# Altium PCB NES Emulator PCB.PcbDoc (part 1 of 3)
Units mm, origin at the board's own origin, x right, y up, seen from the top; angles counter-clockwise.
Board outline 76 x 100 mm, 4 copper layers (Top Layer, GND Plane, Power Layer, Bottom Layer), stack 0.603 mm thick; 101 components, 158 nets, 536 pads, 230 vias.
Unrouted connection lines stored in the file: 6.
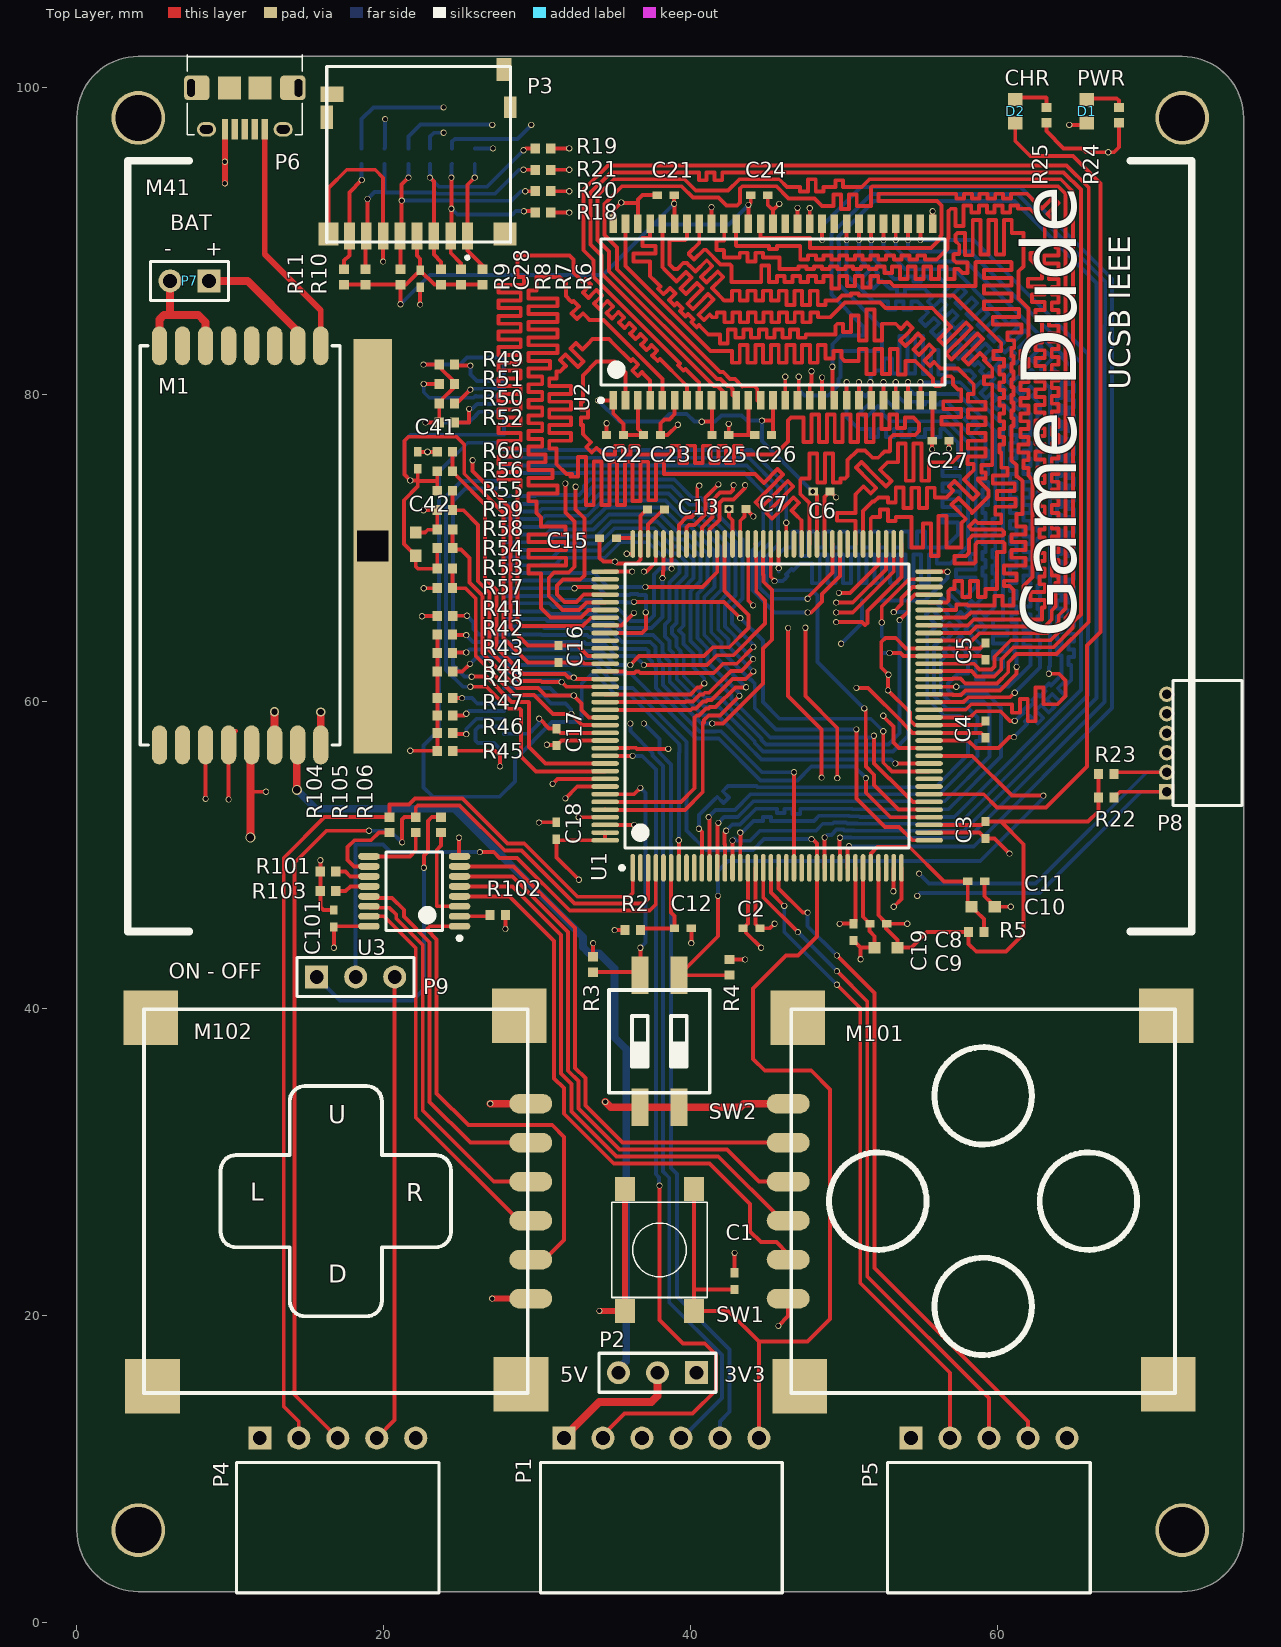
[diagram p0: Top Layer view]
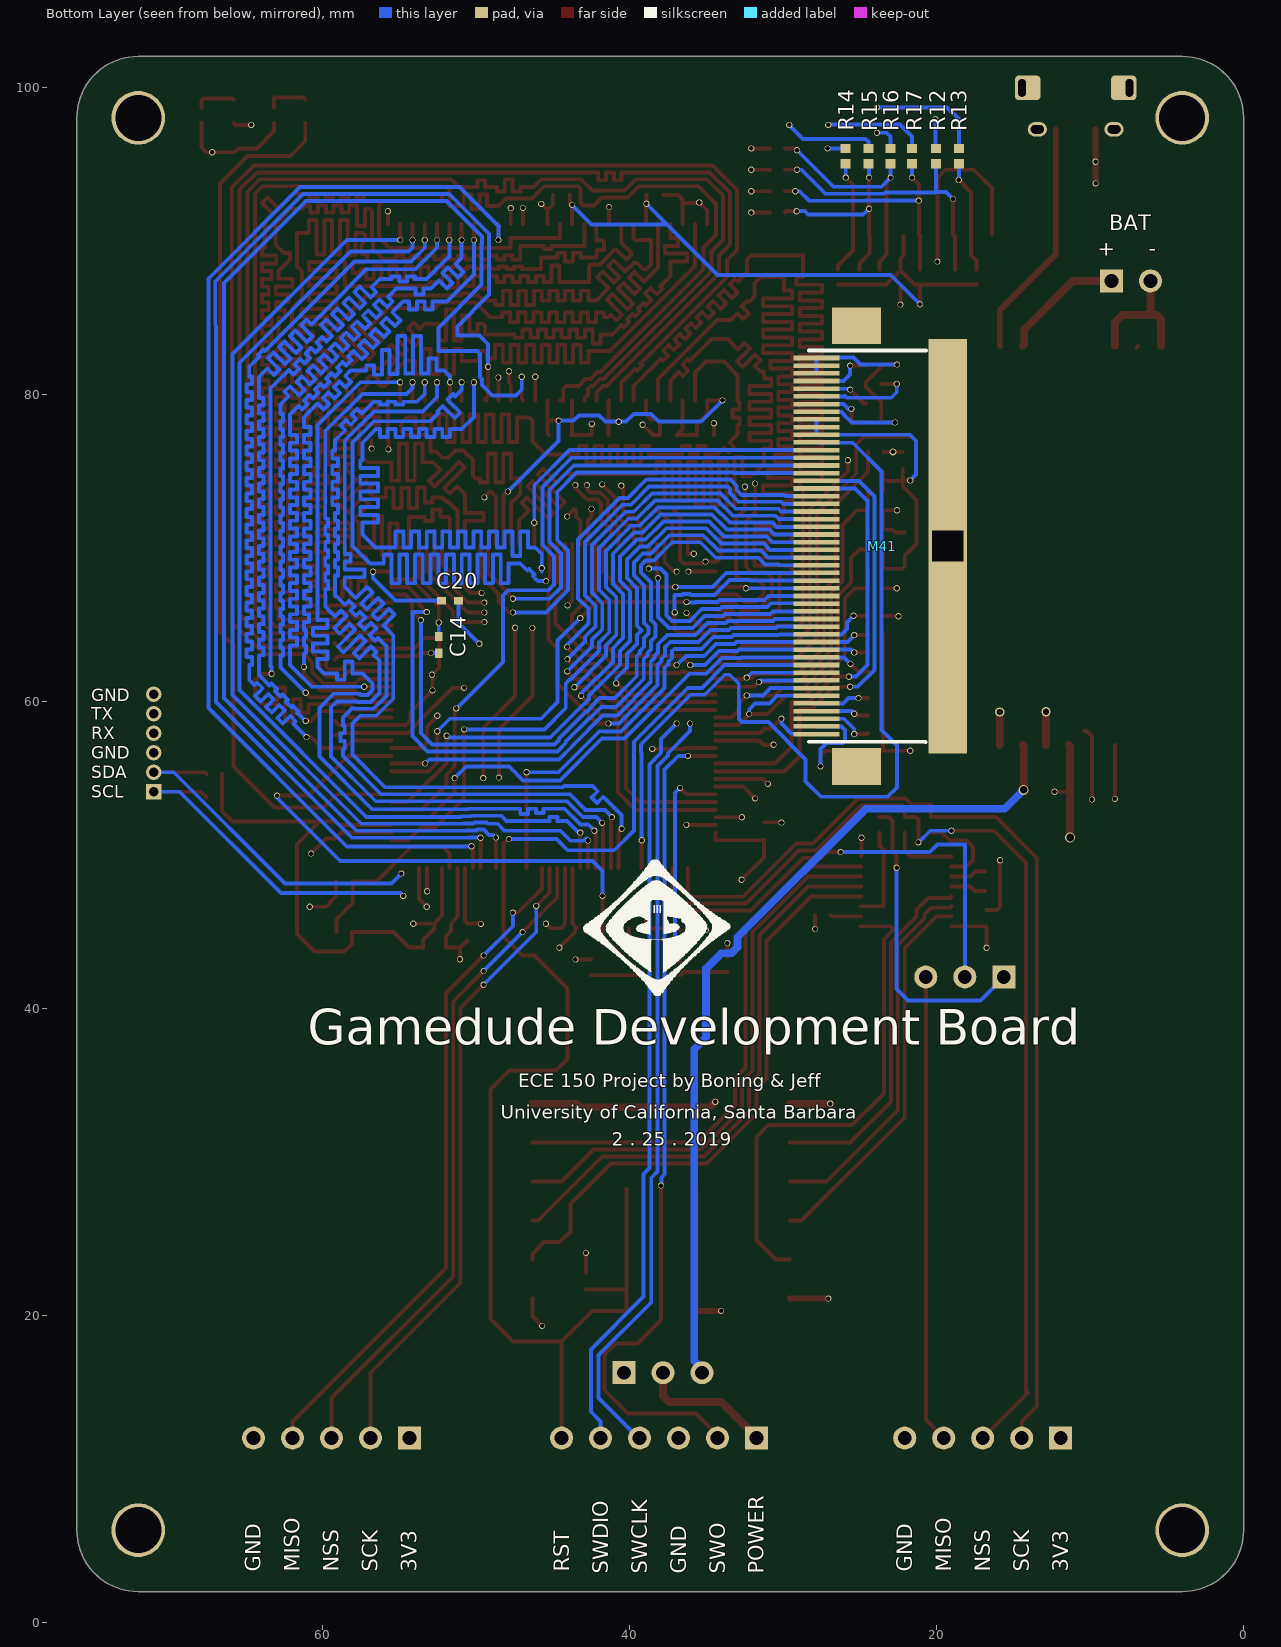
[diagram p1: Bottom Layer view, seen from below]
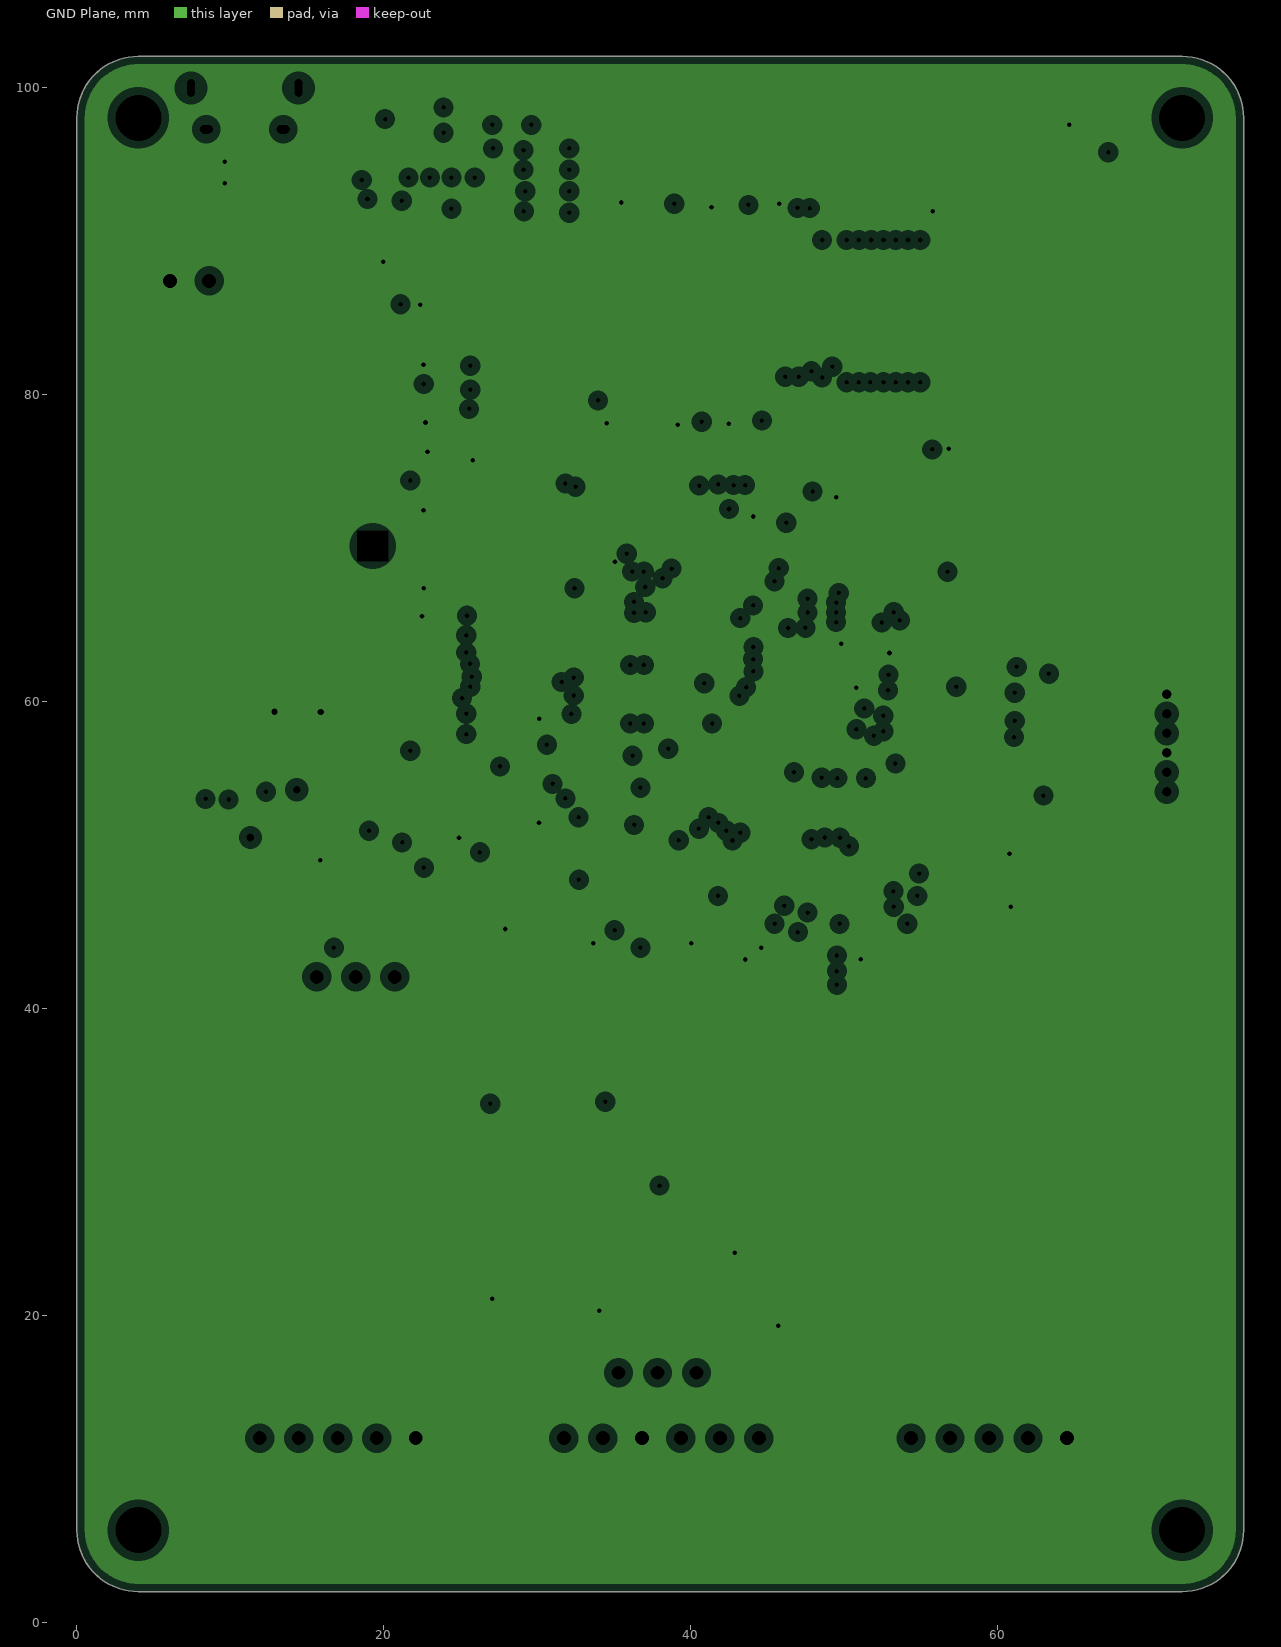
[diagram p2: GND Plane, clearances drawn from the general rule]
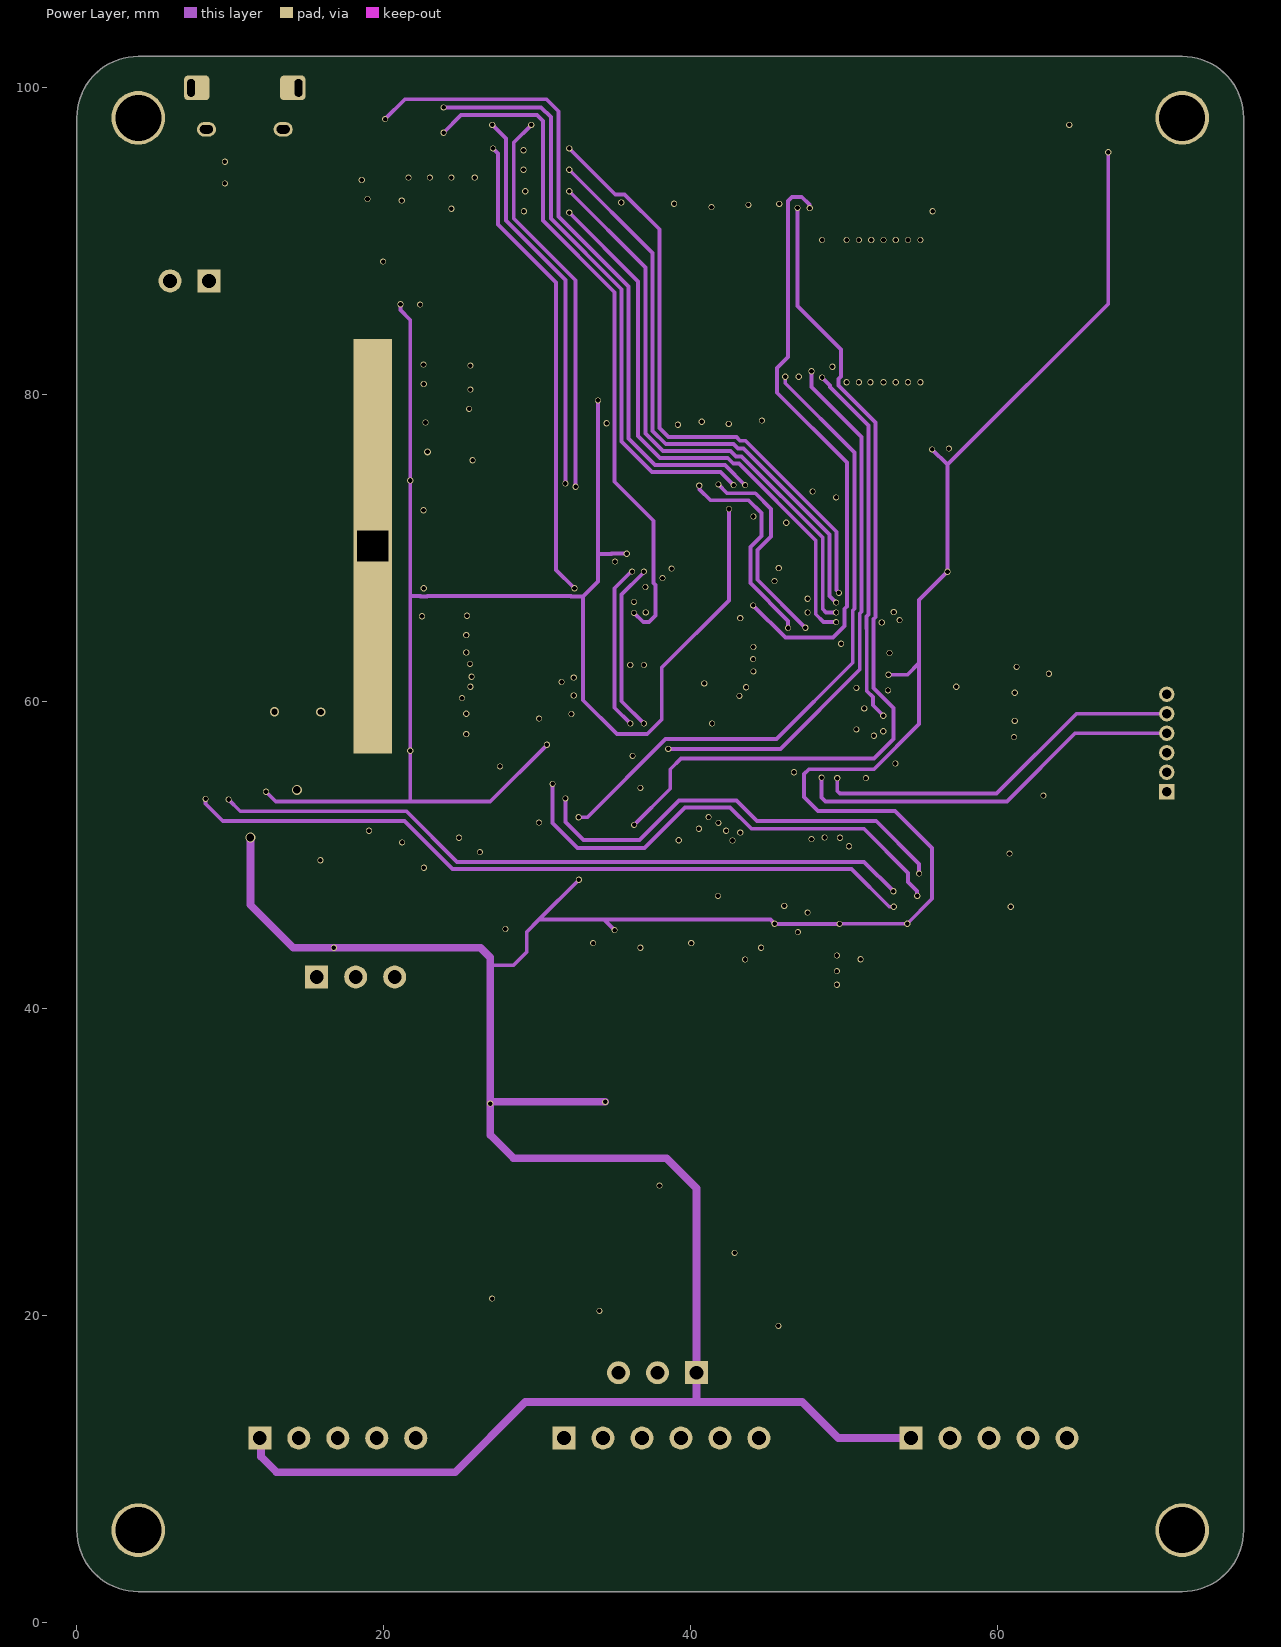
[diagram p3: Power Layer]
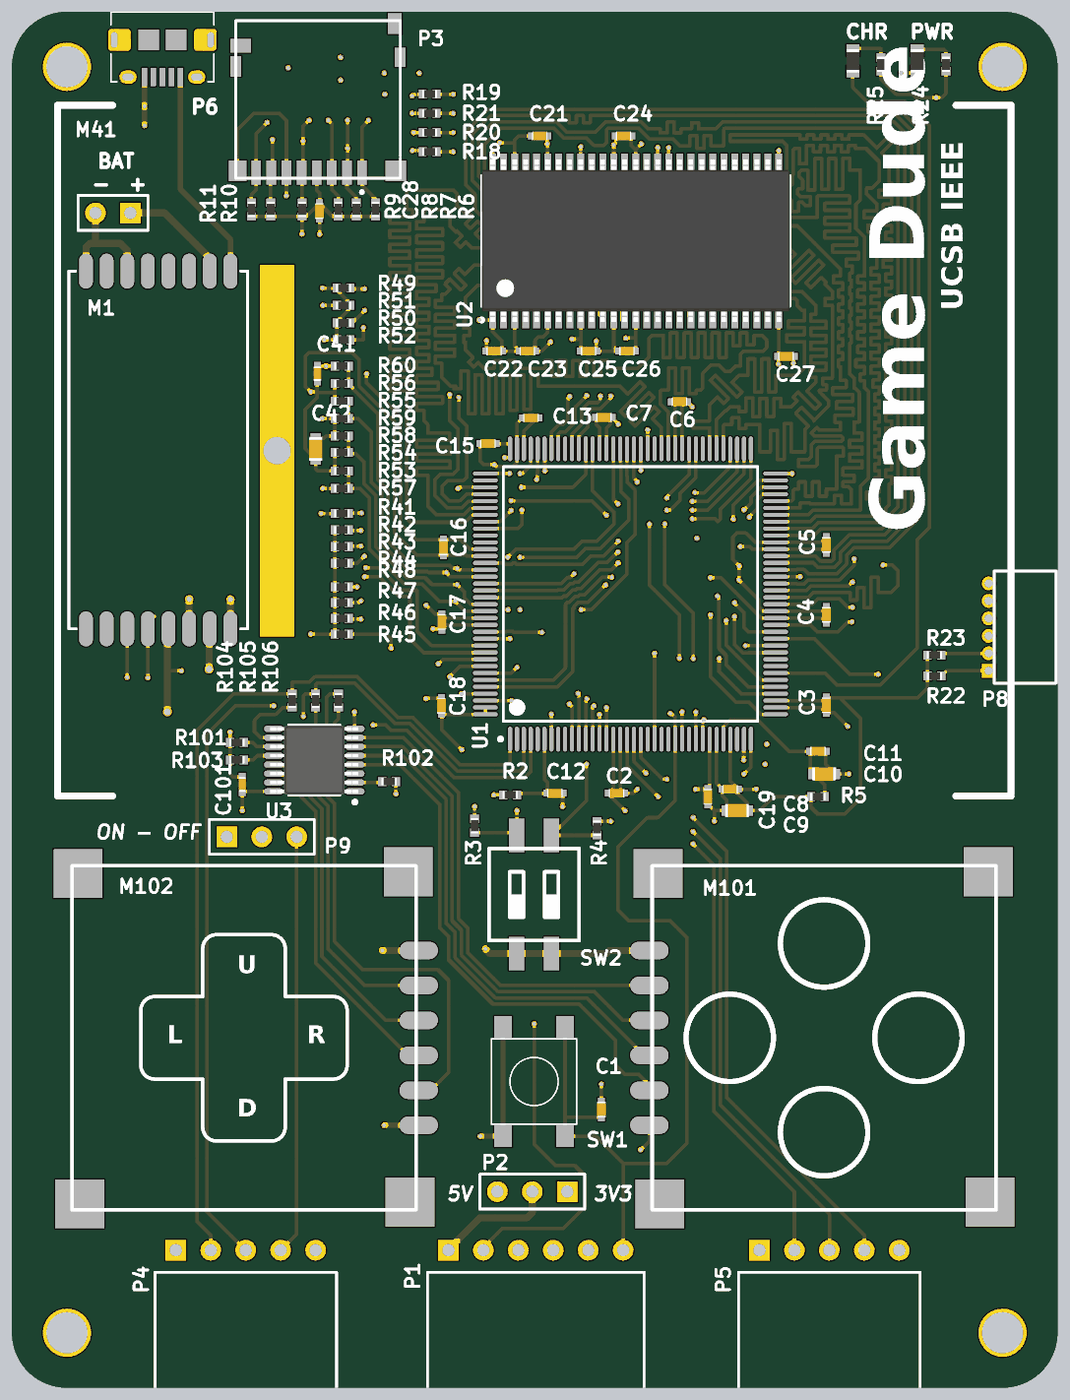
[diagram p6: 3D render of the assembled board from above, using the file's embedded part models]
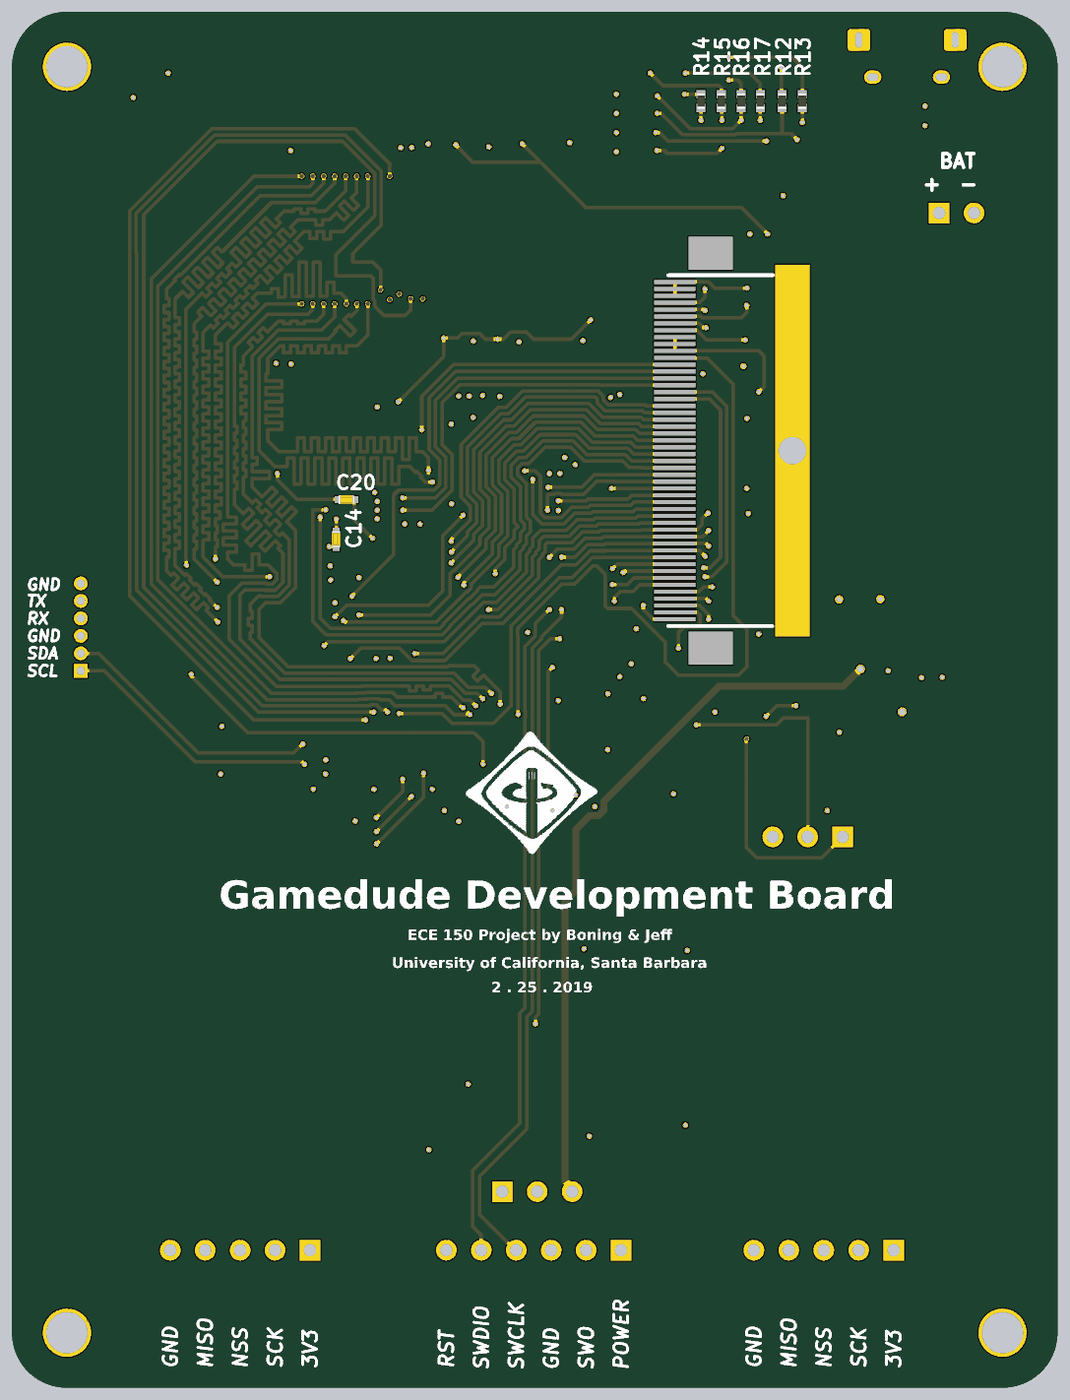
[diagram p7: 3D render of the assembled board from below, using the file's embedded part models]

## Layer stack, top to bottom
Top Solder: solder mask 0.0102, Solder Resist, Dk 3.5
Top Layer: signal copper 0.0356
Dielectric 2: prepreg 0.0711, PP-006, Dk 4.1
GND Plane: plane copper 0.035, net GND
Dielectric 3: prepreg 0.0711, PP-006, Dk 4.1
Power Layer: signal copper 0.035
Dielectric 1: dielectric 0.32, FR-4, Dk 4.8
Bottom Layer: signal copper 0.0356
Bottom Solder: solder mask 0.0102, Solder Resist, Dk 3.5

## Board outline
0,6 0,98 cw(c4,98) 4,102 72,102 cw(c72,98) 76,98 76,6 cw(c72,6) 72,2 4,2 cw(c4,6)

## Design rules (kind name [scope] priority, off if disabled: settings)
Clearance [All] p1: gap=0.2 ignorepadtopadclearanceinfootprint=FALSE
ComponentClearance IgnoreLeftController [InComponent('M102')] p1: gap=0 collisioncheckmode=3 verticalgap=0 showdistances=FALSE
ComponentClearance IgnoreScreen [InComponent('M41')] p2: gap=0 collisioncheckmode=3 verticalgap=0 showdistances=FALSE
ComponentClearance [All] p3: gap=0.254 collisioncheckmode=3 verticalgap=0.254 showdistances=FALSE
HoleSize [All] p1: absolutevalues=TRUE maxlimit=3 minlimit=0.025 maxpercent=80.000 minpercent=20.000
MatchedLengths Mem_Data [InNetClass('MEM_DATA')] p1: tolerance=0.254 checknetsindiffpair=FALSE checkdiffpairvsdiffpair=TRUE checkxsignals=TRUE checkothers=TRUE
MatchedLengths Mem_Addr [InNetClass('MEM_ADDR')] p2: tolerance=0.254 checknetsindiffpair=FALSE checkdiffpairvsdiffpair=TRUE checkxsignals=TRUE checkothers=TRUE
MinimumSolderMaskSliver [All] p1: minsoldermaskwidth=0.2
PlaneClearance [All] p1: clearance=0.508
PlaneConnect [All] p1: planeconnectstyle=Relief reliefexpansion=0.508 reliefentries=4 reliefconductorwidth=0.254 reliefairgap=0.254
PolygonConnect [All] p1: connectstyle=Relief reliefconductorwidth=0.254 reliefentries=4 polygonreliefangle="90 Angle" airgapwidth=0.254
RoutingVias [All] p1: holewidth=0.3 width=0.4 viastyle="Through Hole" minholewidth=0.3 minwidth=0.35 maxholewidth=0.3 maxwidth=0.4
SilkToSilkClearance [All] p1: silktosilkclearance=0.127
SilkToSolderMaskClearance [IsPad] p1: minsilkscreentomaskgap=0.127 clearancetoexposedcopper=TRUE
SolderMaskExpansion [All] p1: expansion=0.102
Width [All] p1: maxlimit=0.508 minlimit=0.254 preferedwidth=0.254
23 further rules are at their usual default settings.

## Classes and differential pairs
component class "Display Module": C41 C42 M41 R41 R42 R43 R44 R45 R46 R47 R48 R49 R50 R51 R52 R53 R54 R55 R56 R57 R58 R59 R60
net class CTRL_2: PF6 PF7 PF8
net class SPI4: PE2 PE4 PE5 PE6 PF6 PF7 PF8 PF9
component class Controller: C101 M101 M102 R101 R102 R103 R104 R105 R106 U3
net class CTRL_1: NetP4_4 NetP9_1 PE2 PE4 PE5
net class SPI2: PB12 PB13 PB14 PB15
net class SPI1: LCD_DCX LCD_SDI LCD_SDO PA15
net class SD_CARD: LCD_R2 PC8 PC9 PC11 PC12 PD2
net class MEM_DATA: MEM_D0 MEM_D1 MEM_D2 MEM_D3 MEM_D4 MEM_D5 MEM_D6 MEM_D7 MEM_D8 MEM_D9 MEM_D10 MEM_D11 MEM_D12 MEM_D13 MEM_D14 MEM_D15
net class MEM_CTRL: MEM_CAS MEM_CKE0 MEM_CLK MEM_NBL0 MEM_NBL1 MEM_NE0 MEM_RAS MEM_WE
net class MEM_ADDR: MEM_A0 MEM_A1 MEM_A2 MEM_A3 MEM_A4 MEM_A5 MEM_A6 MEM_A7 MEM_A8 MEM_A9 MEM_A10 MEM_A11 MEM_BA0 MEM_BA1
net class MCU_DEBUG: LCD_RST PB3 SWCLK SWDIO
net class LCD_SPI: LCD_DCX LCD_SDI LCD_SDO LCD_WRX
net class LCD_R[7..0]: LCD_R0 LCD_R1 LCD_R2 LCD_R3 LCD_R4 LCD_R5 LCD_R6 LCD_R7
net class LCD_G[7..0]: LCD_G0 LCD_G1 LCD_G2 LCD_G3 LCD_G4 LCD_G5 LCD_G6 LCD_G7
net class LCD_DATA: LCD_B0 LCD_B1 LCD_B2 LCD_B3 LCD_B4 LCD_B5 LCD_B6 LCD_B7 LCD_G0 LCD_G1 LCD_G2 LCD_G3 LCD_G4 LCD_G5 LCD_G6 LCD_G7 LCD_R0 LCD_R1 LCD_R2 LCD_R3 LCD_R4 LCD_R5 LCD_R6 LCD_R7
net class LCD_CTRL: LCD_CSX LCD_DCX LCD_DE LCD_IM0 LCD_IM1 LCD_IM2 LCD_IM3 LCD_RDX LCD_RST LCD_TE LCD_WRX
net class LCD_CLK: DOTCLK LCD_HSYNC LCD_VSYNC
net class LCD_B[7..0]: LCD_B0 LCD_B1 LCD_B2 LCD_B3 LCD_B4 LCD_B5 LCD_B6 LCD_B7
component class MCU: C1 C2 C3 C4 C5 C6 C7 C8 C9 C10 C11 C12 C13 C14 C15 C16 C17 C18 C19 C20 C21 C22 C23 C24 C25 C26 C27 C28 D1 D2 M1 P1 P2 P3 P4 P5 P6 P7 P8 P9 P? R2 R3 R4 R5 R6 R7 R8 R9 R10 R11 R12 R13 R14 R15 R16 R17 R18 R19 R20 R21 R22 R23 R24 R25 SW1 SW2 U1 U2

## Components (designator, comment, footprint, x,y, rotation, side; value= is the part's Value field where it differs from the comment)
C1 "0402" CAPC1005X07N 42.837,22.225 r270 top value=100nF
C2 "0402" CAPC1005X07N 43.944,45.212 r0 top value=100nF
C3 "0402" CAPC1005X07N 59.184,51.604 r90 top value=100nF
C4 "0402" CAPC1005X07N 59.184,58.166 r90 top value=100nF
C5 "0402" CAPC1005X07N 59.184,63.246 r90 top value=100nF
C6 "0402" CAPC1005X07N 48.516,73.66 r180 top value=100nF
C7 "0402" CAPC1005X07N 43.029,72.517 r180 top value=100nF
C8 "0402" CAPC1005X07N 52.21,45.504 r180 top value=100nF
C9 "0603" CAPC1608X10N 52.71,43.942 r180 top value=1uF
C10 "0603" CAPC1608X10N 59.031,46.609 r180 top value=1uF
C11 "0402" CAPC1005X07N 58.583,48.26 r180 top value=100nF
C12 "0402" CAPC1005X07N 39.473,45.204 r0 top value=100nF
C13 "0402" CAPC1005X07N 37.721,72.49 r180 top value=?
C14 "0402" CAPC1005X07N 52.435,63.669 r270 bottom value=?
C15 "0402" CAPC1005X07N 34.594,70.617 r180 top value=100nF
C16 "0402" CAPC1005X07N 31.367,63.073 r90 top value=100nF
C17 "0402" CAPC1005X07N 31.244,57.658 r90 top value=100nF
C18 "0402" CAPC1005X07N 31.218,51.562 r90 top value=100nF
C19 "0402" CAPC1005X07N 50.583,44.958 r270 top value=100nF
C20 "0402" CAPC1005X07N 51.691,66.548 r180 bottom value=100nF
C21 "0402" CAPC1005X07N 38.356,92.964 r180 top value=100nF
C22 "0402" CAPC1005X07N 35.054,77.343 r180 top value=100nF
C23 "0402" CAPC1005X07N 37.467,77.343 r0 top value=100nF
C24 "0402" CAPC1005X07N 44.452,92.964 r0 top value=100nF
C25 "0402" CAPC1005X07N 41.912,77.343 r0 top value=100nF
C26 "0402" CAPC1005X07N 44.706,77.343 r180 top value=100nF
C27 "0402" CAPC1005X07N 56.263,76.962 r0 top value=100nF
C28 "0402" CAPC1005X07N 22.362,87.515 r270 top value=100nF
C41 "0402" CAPC1005X06N 22.201,75.692 r270 top value=100nF
C42 "0603" CAPC1608X10N 22.074,70.231 r270 top value=1uF
C101 "0402" CAPC1005X06N 16.74,45.847 r270 top value=100nF
D1 "LED" RESC1608X06N 65.786,98.425 r270 top
D2 "LED" RESC1608X06N 61.124,98.425 r270 top
M1 "PW Module" "POWER MODULE" 4.132,57.15 r90 top
M41 "MI0283QT" 2.8_SCREEN_MODULE_SKT 40.268,70.104 r270 top locked
M101 "Buttons Module" BUTTON_MODULE 59.031,27.432 r0 top
M102 "Joystick_Module" JOYSTICK_MODULE 16.867,27.432 r0 top
P1 "Header 6" HDR1X6_RANG 38.076,12 r0 top
P2 "Header 3" HDR1X3 40.362,16.256 r180 top
P3 "114-00841-68-1" AMPHENOL_114-00841-68 16.276,101.348 r0 top
P4 "Header 5" HDR1X5_RANG 16.994,12 r0 top
P5 "Header 5" HDR1X5_RANG 59.412,12 r0 top
P6 "Micro USB" "USB_Mirco_Amphenol FCI_10118194" 10.938,99.949 r180 top
P7 "Header 2" HDR1X2 8.612,87.376 r180 top
P8 "Header 6" MHDR1X6_RANG 70.993,57.277 r90 top
P9 "Header 3" HDR1X3 15.621,42.037 r0 top
R2 "0402" RESC1005X04N 36.21,45.085 r180 top value=0R
R3 "0402" RESC1005X04N 33.631,42.848 r270 top value=100K
R4 "0402" RESC1005X04N 42.521,42.672 r270 top value=100K
R5 "0402" RESC1005X04N 58.583,44.958 r0 top value=0R
R6 "0402" RESC1005X04N 26.426,87.63 r90 top value=1K
R7 "0402" RESC1005X04N 25.029,87.63 r90 top value=1K
R8 "0402" RESC1005X04N 23.716,87.63 r90 top value=1K
R9 "0402" RESC1005X04N 21.092,87.63 r90 top value=1K
R10 "0402" RESC1005X04N 18.806,87.63 r90 top value=1K
R11 "0402" RESC1005X04N 17.409,87.63 r90 top value=1K
R12 "0402" RESC1005X04N 20.025,95.504 r270 bottom value=0
R13 "0402" RESC1005X04N 18.552,95.504 r270 bottom value=0
R14 "0402" RESC1005X04N 25.918,95.504 r270 bottom value=0
R15 "0402" RESC1005X04N 24.445,95.504 r270 bottom value=0
R16 "0402" RESC1005X04N 22.997,95.504 r270 bottom value=0
R17 "0402" RESC1005X04N 21.6,95.504 r270 bottom value=0
R18 "0402" RESC1005X04N 30.363,91.821 r180 top value=0
R19 "0402" RESC1005X04N 30.363,96.012 r180 top value=0
R20 "0402" RESC1005X04N 30.363,93.218 r180 top value=0
R21 "0402" RESC1005X04N 30.363,94.615 r180 top value=0
R22 "0402" RESC1005X04N 67.056,53.721 r0 top value=1K
R23 "0402" RESC1005X04N 67.048,55.245 r0 top value=1K
R24 "0402" RESC1005X04N 67.887,98.171 r90 top value=1K
R25 "0402" RESC1005X04N 63.156,98.171 r90 top value=1K
R41 "0402" RESC1005X04N 23.979,65.537 r0 top value=10K
R42 "0402" RESC1005X04N 23.971,64.343 r0 top value=10K
R43 "0402" RESC1005X04N 23.971,63.124 r0 top value=10K
R44 "0402" RESC1005X04N 23.979,61.924 r0 top value=10K
R45 "0402" RESC1005X04N 23.979,56.769 r180 top value=0R
R46 "0402" RESC1005X04N 23.979,57.912 r180 top value=0R
R47 "0402" RESC1005X04N 23.979,59.055 r180 top value=0R
R48 "0402" RESC1005X04N 23.979,60.198 r180 top value=0R
R49 "0402" RESC1005X04N 24.106,81.921 r180 top value=10K
R50 "0402" RESC1005X04N 24.106,79.39 r180 top value=10K
R51 "0402" RESC1005X04N 24.106,80.66 r0 top value=10K
R52 "0402" RESC1005X04N 24.106,78.15 r180 top value=10K
R53 "0402" RESC1005X04N 23.976,68.627 r0 top value=10K
R54 "0402" RESC1005X04N 23.979,69.977 r0 top value=10K
R55 "0402" RESC1005X04N 23.976,73.707 r0 top value=10K
R56 "0402" RESC1005X04N 23.976,74.977 r0 top value=10K
R57 "0402" RESC1005X04N 23.976,67.357 r180 top value=10K
R58 "0402" RESC1005X04N 23.979,71.167 r180 top value=10K
R59 "0402" RESC1005X04N 23.976,72.437 r180 top value=10K
R60 "0402" RESC1005X04N 23.976,76.247 r180 top value=10K
R101 "0402" RESC1005X04N 16.359,48.895 r180 top value=100K
R102 "0402" RESC1005X04N 27.416,46.058 r180 top value=100K
R103 "0402" RESC1005X04N 16.359,47.625 r0 top value=100K
R104 "0402" RESC1005X04N 20.364,51.943 r270 top value=0R
R105 "0402" RESC1005X04N 22.074,51.943 r270 top value=0R
R106 "0402" RESC1005X04N 23.725,51.943 r270 top value=0R
SW1 "C&K PTS645" C&K_PTS645_SMT 37.949,24.257 r270 top
SW2 "SW_DIP-2" CTS_219-2_SMT 37.949,37.846 r180 top
U1 "STM32F429ZIT6" STM-LQFP144_N 44.96,59.69 r90 top
U2 "IS42S16400J" TSOP80P1180X120-54N 45.341,85.344 r90 top
U3 "CD4021BPW" PW0016A_N 21.976,47.614 r180 top

## Footprints (in the part's own frame and the unit in brackets; to place one, negate y for a bottom-side part, rotate by r counter-clockwise, add the part's x,y. Pads: shape width x height; smd on the part's side, far side on the other; paste and mask are expansions set on the pad)
2.8_SCREEN_MODULE_SKT [mm] "2.8\" Screen Module"
  rect 2.4x3.2 smd far side: 0(-14.35,-15.05) 0(14.35,-15.05)
  rect 27x2.5 hole 2 square: 0(0,-21)
  rect 0.3x3 smd far side: 1(12.25,-12.45) 2(11.75,-12.45) 3(11.25,-12.45) 4(10.75,-12.45) 5(10.25,-12.45) 6(9.75,-12.45) 7(9.25,-12.45) 8(8.75,-12.45) 9(8.25,-12.45) 10(7.75,-12.45) 11(7.25,-12.45) 12(6.75,-12.45) 13(6.25,-12.45) 14(5.75,-12.45) 15(5.25,-12.45) 16(4.75,-12.45) 17(4.25,-12.45) 18(3.75,-12.45) 19(3.25,-12.45) 20(2.75,-12.45) 21(2.25,-12.45) 22(1.75,-12.45) 23(1.25,-12.45) 24(0.75,-12.45) 25(0.25,-12.45) 26(-0.25,-12.45) 27(-0.75,-12.45) 28(-1.25,-12.45) 29(-1.75,-12.45) 30(-2.25,-12.45) 31(-2.75,-12.45) 32(-3.25,-12.45) 33(-3.75,-12.45) 34(-4.25,-12.45) 35(-4.75,-12.45) 36(-5.25,-12.45) 37(-5.75,-12.45) 38(-6.25,-12.45) 39(-6.75,-12.45) 40(-7.25,-12.45) 41(-7.75,-12.45) 42(-8.25,-12.45) 43(-8.75,-12.45) 44(-9.25,-12.45) 45(-9.75,-12.45) 46(-10.25,-12.45) 47(-10.75,-12.45) 48(-11.25,-12.45) 49(-11.75,-12.45) 50(-12.25,-12.45)
  silkscreen extent -25.1,-36.95 25.1,32.35
AMPHENOL_114-00841-68 [mm] "Amphenol Micro SD Connector"
  rect 0.7x1.75 smd: 1(9.175,-11.038) 6(3.675,-11.038)
  rect 0.701x1.753 smd: 2(8.075,-11.038) 8(1.475,-11.038)
  rect 0.701x1.752 smd: 3(6.975,-11.038) 4(5.875,-11.038) 5(4.775,-11.038) 7(2.575,-11.038)
  rect 1.3x1.5 smd: 9(0.127,-10.913)
  rect 1.502x1.502 smd: 10(11.625,-10.913)
  rect 0.801x1.501 smd: 11(0,-3.313)
  rect 0.8x1.401 smd: 12(11.95,-2.663)
  rect 1.5x1 smd: 13(0.355,-1.813)
  rect 1.001x1.502 smd: 14(11.55,-0.213)
  silkscreen extent 0,-12.56 11.96,0
BUTTON_MODULE [mil] "Footprint for Buttons Module"
  rect 140x140 smd: 0(-475,470) 0(-470,-475) 0(470,475) 0(475,-470)
  oval 110x50 smd: 1(-500,250) 2(-500,150) 3(-500,50) 4(-500,-50) 5(-500,-150) 6(-500,-250)
  silkscreen extent -492,-492 492,492
C&K_PTS645_SMT [mm] "C&K PTS645 6mm x 6mm Tact Switch"
  rect 1.55x1.3 smd: 1(-3.975,2.25) 2(3.975,2.25) 3(-3.975,-2.25) 4(3.975,-2.25)
  silkscreen extent -3.1,-3.1 3.1,3.1
CAPC1005X06N [mm] "0402 Chip Capacitor, 2-Leads, Body 1.00x0.50mm, IPC Medium Density"
  rect 0.6x0.5 smd: 1(-0.55,0) 2(0.55,0)
  body extent -0.55,-0.28 0.55,0.28, height 0.6
CAPC1005X07N [mm] "0402 Chip Capacitor, 2-Leads, Body 1.00x0.50mm, IPC Medium Density"
  rect 0.6x0.5 smd: 1(-0.55,0) 2(0.55,0)
  body extent -0.58,-0.33 0.58,0.33, height 0.71
CAPC1608X10N [mm] "0603 Chip Capacitor, 2-Leads, Body 1.60x0.81mm, IPC Medium Density"
  rect 0.8x0.75 smd: 1(-0.75,0) 2(0.75,0)
  body extent -0.87,-0.48 0.87,0.48, height 1.02
CTS_219-2_SMT [mm] "CTS 219 Series 2 Positions Surafece Mount"
  rect 1.13x2.44 smd: 1(-1.27,-4.3) 2(1.27,-4.3) 3(1.27,4.3) 4(-1.27,4.3)
  silkscreen extent -3.27,-3.35 3.27,3.35
HDR1X2 [mm] "Connector; Header; 2 Position"
  rect 1.5x1.5 hole 0.9: 1(0,0)
  round 1.5 hole 0.9: 2(2.54,0)
  silkscreen extent -1.27,-1.27 3.81,1.27
HDR1X3 [mm] "Connector; Header; 3 Position"
  rect 1.5x1.5 hole 0.9: 1(0,0)
  round 1.5 hole 0.9: 2(2.54,0) 3(5.08,0)
  silkscreen extent -1.27,-1.27 6.35,1.27
HDR1X5_RANG [mm] "Header 5P Right Angle"
  rect 1.5x1.5 hole 0.9: 1(-5.08,0)
  round 1.5 hole 0.9: 2(-2.54,0) 3(0,0) 4(2.54,0) 5(5.08,0)
  silkscreen extent -6.6,-10.1 6.6,-1.6
HDR1X6_RANG [mm] "Header 6P Right Angle"
  rect 1.5x1.5 hole 0.9: 1(-6.35,0)
  round 1.5 hole 0.9: 2(-3.81,0) 3(-1.27,0) 4(1.27,0) 5(3.81,0) 6(6.35,0)
  silkscreen extent -7.87,-10.1 7.87,-1.6
JOYSTICK_MODULE [mil] "Footprint for Joystick Module"
  rect 140x140 smd: 0(-475,470) 0(-470,-475) 0(470,475) 0(475,-470)
  oval 110x50 smd: 1(500,250) 2(500,150) 3(500,50) 4(500,-50) 5(500,-150) 6(500,-250)
  silkscreen extent -492,-492 492,492
MHDR1X6_RANG [mm]
  rect 1x1 hole 0.6: 1(-3.175,0)
  round 1 hole 0.6: 2(-1.905,0) 3(-0.635,0) 4(0.635,0) 5(1.905,0) 6(3.175,0)
  silkscreen extent -4.08,-4.9 4.08,-0.4
"POWER MODULE" [mm]
  oval 2.54x1 smd: 1(0,-1.25) 1(26,-11.75) 2(0,-2.75) 2(26,-10.25) 3(0,-4.25) 3(26,-8.75) 4(0,-5.75) 4(26,-7.25) 5(0,-7.25) 5(26,-5.75) 6(0,-8.75) 6(26,-4.25) 7(0,-10.25) 7(26,-2.75) 8(0,-11.75) 8(26,-1.25)
  silkscreen extent 0,-13 26,0
PW0016A_N [mm] "SOP, 16-Leads, Body 5.1x4.5mm, Pitch 0.65mm, IPC Medium Density"
  oval 1.4x0.45 smd: 1(-2.95,2.275) 2(-2.95,1.625) 3(-2.95,0.975) 4(-2.95,0.325) 5(-2.95,-0.325) 6(-2.95,-0.975) 7(-2.95,-1.625) 8(-2.95,-2.275) 9(2.95,-2.275) 10(2.95,-1.625) 11(2.95,-0.975) 12(2.95,-0.325) 13(2.95,0.325) 14(2.95,0.975) 15(2.95,1.625) 16(2.95,2.275)
  silkscreen extent -3.08,-2.55 1.85,3.17, body extent -3.21,-2.5 3.21,2.5, height 1.2
RESC1005X04N [mm] "0402 Chip Resistor, 2-Leads, Body 1.00x0.50mm, IPC Medium Density"
  rect 0.6x0.65 smd: 1(-0.5,0) 2(0.5,0)
  body extent -0.55,-0.28 0.55,0.28, height 0.4
RESC1608X06N [mm] "0603 Chip Resistor, 2-Leads, Body 1.60x0.85mm, IPC Medium Density"
  rect 0.85x0.95 smd: 1(-0.775,0) 2(0.775,0)
  body extent -0.85,-0.48 0.85,0.48, height 0.55
STM-LQFP144_N [mm] "Thin QFP, 144-Leads, Body 20x20mm, Pitch 0.5mm, IPC Medium Density"
  oval 1.8x0.3 smd: 1(-10.55,8.75) 2(-10.55,8.25) 3(-10.55,7.75) 4(-10.55,7.25) 5(-10.55,6.75) 6(-10.55,6.25) 7(-10.55,5.75) 8(-10.55,5.25) 9(-10.55,4.75) 10(-10.55,4.25) 11(-10.55,3.75) 12(-10.55,3.25) 13(-10.55,2.75) 14(-10.55,2.25) 15(-10.55,1.75) 16(-10.55,1.25) 17(-10.55,0.75) 18(-10.55,0.25) 19(-10.55,-0.25) 20(-10.55,-0.75) 21(-10.55,-1.25) 22(-10.55,-1.75) 23(-10.55,-2.25) 24(-10.55,-2.75) 25(-10.55,-3.25) 26(-10.55,-3.75) 27(-10.55,-4.25) 28(-10.55,-4.75) 29(-10.55,-5.25) 30(-10.55,-5.75) 31(-10.55,-6.25) 32(-10.55,-6.75) 33(-10.55,-7.25) 34(-10.55,-7.75) 35(-10.55,-8.25) 36(-10.55,-8.75) 73(10.55,-8.75) 74(10.55,-8.25) 75(10.55,-7.75) 76(10.55,-7.25) 77(10.55,-6.75) 78(10.55,-6.25) 79(10.55,-5.75) 80(10.55,-5.25) 81(10.55,-4.75) 82(10.55,-4.25) 83(10.55,-3.75) 84(10.55,-3.25) 85(10.55,-2.75) 86(10.55,-2.25) 87(10.55,-1.75) 88(10.55,-1.25) 89(10.55,-0.75) 90(10.55,-0.25) 91(10.55,0.25) 92(10.55,0.75) 93(10.55,1.25) 94(10.55,1.75) 95(10.55,2.25) 96(10.55,2.75) 97(10.55,3.25) 98(10.55,3.75) 99(10.55,4.25) 100(10.55,4.75) 101(10.55,5.25) 102(10.55,5.75) 103(10.55,6.25) 104(10.55,6.75) 105(10.55,7.25) 106(10.55,7.75) 107(10.55,8.25) 108(10.55,8.75)
  oval 0.3x1.8 smd: 37(-8.75,-10.55) 38(-8.25,-10.55) 39(-7.75,-10.55) 40(-7.25,-10.55) 41(-6.75,-10.55) 42(-6.25,-10.55) 43(-5.75,-10.55) 44(-5.25,-10.55) 45(-4.75,-10.55) 46(-4.25,-10.55) 47(-3.75,-10.55) 48(-3.25,-10.55) 49(-2.75,-10.55) 50(-2.25,-10.55) 51(-1.75,-10.55) 52(-1.25,-10.55) 53(-0.75,-10.55) 54(-0.25,-10.55) 55(0.25,-10.55) 56(0.75,-10.55) 57(1.25,-10.55) 58(1.75,-10.55) 59(2.25,-10.55) 60(2.75,-10.55) 61(3.25,-10.55) 62(3.75,-10.55) 63(4.25,-10.55) 64(4.75,-10.55) 65(5.25,-10.55) 66(5.75,-10.55) 67(6.25,-10.55) 68(6.75,-10.55) 69(7.25,-10.55) 70(7.75,-10.55) 71(8.25,-10.55) 72(8.75,-10.55) 109(8.75,10.55) 110(8.25,10.55) 111(7.75,10.55) 112(7.25,10.55) 113(6.75,10.55) 114(6.25,10.55) 115(5.75,10.55) 116(5.25,10.55) 117(4.75,10.55) 118(4.25,10.55) 119(3.75,10.55) 120(3.25,10.55) 121(2.75,10.55) 122(2.25,10.55) 123(1.75,10.55) 124(1.25,10.55) 125(0.75,10.55) 126(0.25,10.55) 127(-0.25,10.55) 128(-0.75,10.55) 129(-1.25,10.55) 130(-1.75,10.55) 131(-2.25,10.55) 132(-2.75,10.55) 133(-3.25,10.55) 134(-3.75,10.55) 135(-4.25,10.55) 136(-4.75,10.55) 137(-5.25,10.55) 138(-5.75,10.55) 139(-6.25,10.55) 140(-6.75,10.55) 141(-7.25,10.55) 142(-7.75,10.55) 143(-8.25,10.55) 144(-8.75,10.55)
  silkscreen extent -10.67,-9.25 9.25,9.57, body extent -10,-10 10,10, height 1.6
TSOP80P1180X120-54N [mm] "TSOP, 54-Leads, Body 22.20x10.15mm, Pitch 0.80mm, IPC Medium Density"
  rect 1.2x0.5 smd: 1(-5.75,10.4) 2(-5.75,9.6) 3(-5.75,8.8) 4(-5.75,8) 5(-5.75,7.2) 6(-5.75,6.4) 7(-5.75,5.6) 8(-5.75,4.8) 9(-5.75,4) 10(-5.75,3.2) 11(-5.75,2.4) 12(-5.75,1.6) 13(-5.75,0.8) 14(-5.75,0) 15(-5.75,-0.8) 16(-5.75,-1.6) 17(-5.75,-2.4) 18(-5.75,-3.2) 19(-5.75,-4) 20(-5.75,-4.8) 21(-5.75,-5.6) 22(-5.75,-6.4) 23(-5.75,-7.2) 24(-5.75,-8) 25(-5.75,-8.8) 26(-5.75,-9.6) 27(-5.75,-10.4) 28(5.75,-10.4) 29(5.75,-9.6) 30(5.75,-8.8) 31(5.75,-8) 32(5.75,-7.2) 33(5.75,-6.4) 34(5.75,-5.6) 35(5.75,-4.8) 36(5.75,-4) 37(5.75,-3.2) 38(5.75,-2.4) 39(5.75,-1.6) 40(5.75,-0.8) 41(5.75,0) 42(5.75,0.8) 43(5.75,1.6) 44(5.75,2.4) 45(5.75,3.2) 46(5.75,4) 47(5.75,4.8) 48(5.75,5.6) 49(5.75,6.4) 50(5.75,7.2) 51(5.75,8) 52(5.75,8.8) 53(5.75,9.6) 54(5.75,10.4)
  silkscreen extent -5.87,-11.2 4.75,11.32, body extent -5.9,-11.2 5.9,11.2, height 1.2
"USB_Mirco_Amphenol FCI_10118194" [mm] "Amphenol FCI 10118194 Micro USB Connector"
  rect 0.4x1.35 smd: 1(-1.3,2.7) 2(-0.65,2.7) 3(0,2.7) 4(0.65,2.7) 5(1.3,2.7)
  rrect30% 1.65x1.6 hole 1.15 slot 0.5 at 0 deg copper offset 0.375,0: ""(-3.5,0)
  oval 1.25x0.95 hole 0.55 slot 0.85 at 0 deg: ""(-2.5,2.7) ""(2.5,2.7)
  rect 1.5x1.5 smd: ""(-1,0) ""(1,0)
  rrect30% 1.65x1.6 hole 1.15 slot 0.5 at 0 deg copper offset -0.375,0: ""(3.5,0)
  silkscreen extent -3.75,-2.15 3.75,3.05

## Part data
C1 C2 C3 C4 C5 C6 C7 C8 C9 C10 C11 C12 C13 C14 C15 C16 C17 C18 C19 C20 C21 C22 C23 C24 C25 C26 C27 C28 C41 C42 C101: library part Cap, "Capacitor", LatestRevisionDate=17-Jul-2002, LatestRevisionNote="Re-released for DXP Platform.", PackageDescription="Radial Cap, Thru-Hole; 2 Leads; 0.3 in Pin Spacing", PackageReference=RAD-0.3, Published=8-Jun-2000, Publisher="Altium Limited"
D1 D2: library part LED-1, "General LED"
M1: "Power Supply Module"
M41: library part "Screen Module"
M101: "Controller Buttons Module"
M102: library part "Joystick Module", "Controller Joystick module"
P1 P8: "Header, 6-Pin", LatestRevisionDate=17-Jul-2002, LatestRevisionNote="Re-released for DXP Platform.", Publisher="Altium Limited"
P2 P9: "Header, 3-Pin", LatestRevisionDate=17-Jul-2002, LatestRevisionNote="Re-released for DXP Platform.", Publisher="Altium Limited"
P3: library part "Amphenol 114-00841-68-1", "CONN MICRO SD CARD PUSH-PULL R/A", Flammability Rating="UL94 V-0", Manufacturer="Amphenol Commercial", Manufacturer Part Number=114-00841-68, Package Quantity=1, ComponentLink1Description=https://media.digikey.com/pdf/Data%20Sheets/Amphenol%20PDFs/114-00841-68.pdf?src-supplier=Digi-Key, ComponentLink1URL=https://media.digikey.com/pdf/Data%20Sheets/Amphenol%20PDFs/114-00841-68.pdf?src-supplier=Digi-Key, ComponentLink2Description=http://www.mouser.com/ds/2/18/11400841-283410.pdf?src-supplier=Mouser, ComponentLink2URL=http://www.mouser.com/ds/2/18/11400841-283410.pdf?src-supplier=Mouser, ComponentLink3Description=http://www.newark.com/pdfs/datasheets/Amphenol/11400841.pdf?src-supplier=Element14, ComponentLink3URL=http://www.newark.com/pdfs/datasheets/Amphenol/11400841.pdf?src-supplier=Element14, ComponentLink4Description=http://www.amphenolcanada.com/ProductSearch/drawings/AC/1140084168.pdf?src-supplier=Avnet, ComponentLink4URL=http://www.amphenolcanada.com/ProductSearch/drawings/AC/1140084168.pdf?src-supplier=Avnet, ComponentLink5Description=http://www.alliedelec.com/images/products/datasheets/bm/AMPHENOL_CANADA/70323450.pdf?src-supplier=Allied+Electronics, ComponentLink5URL=http://www.alliedelec.com/images/products/datasheets/bm/AMPHENOL_CANADA/70323450.pdf?src-supplier=Allied+Electronics, Connector Type=Connector, Contact Material="Copper,Copper Alloy", Contact Plating=Gold, Depth=11.45mm, Gender=Receptacle, Height=1.55mm, Housing Material=Polymer, Lead Free="Lead Free", Length=15.6mm, Mount="Surface Mount", Number of Contacts=8, Number of Rows=1, Orientation="Right Angle", Packaging="Tape and Reel", Pitch=1.1mm, Pricing 1="1=1.31, 10=1.188, 25=1.1156, 50=1.0672, 100=1.0187, 250=0.9217, 500=0.8489 (USD)", Radiation Hardening=No, REACH SVHC=Unknown, Stock 1=71075, Supplier 1=Digi-Key, Termination=SMD/SMT
P4 P5: "Header, 5-Pin", LatestRevisionDate=17-Jul-2002, LatestRevisionNote="Re-released for DXP Platform.", Publisher="Altium Limited"
P6: library part CONN_MICRO_USB, "General  Micro USB"
P7: "Header, 2-Pin", LatestRevisionDate=17-Jul-2002, LatestRevisionNote="Re-released for DXP Platform.", Publisher="Altium Limited"
R2 R3 R4 R5 R6 R7 R8 R9 R10 R11 R12 R13 R14 R15 R16 R17 R18 R19 R20 R21 R22 R23 R24 R25 R41 R42 R43 R44 R45 R46 R47 R48 R49 R50 R51 R52 R53 R54 R55 R56 R57 R58 R59 R60 R101 R102 R103 R104 R105 R106: library part Res1, "Resistor", LatestRevisionDate=17-Jul-2002, LatestRevisionNote="Re-released for DXP Platform.", PackageDescription="Axial Device, Thru-Hole; 2 Leads; 0.3 in Pin Spacing", PackageReference=AXIAL-0.3, Published=8-Jun-2000, Publisher="Altium Limited"
SW1: library part SW_TACT, "General Tactile Switch"
SW2: "DIP Switch, 2 Position, SPST", LatestRevisionDate=17-Jul-2002, LatestRevisionNote="Re-released for DXP Platform.", PackageReference=DIP-4, Published=24-Mar-1999, Publisher="Altium Limited"
U1: "ARM Cortex-M4 32-bit MCU+FPU, 225 DMIPS, 2048 kB Flash, 256 kB Internal RAM, 114 I/Os, 144-pin LQFP, -40 to 85 degC, Tray", I/Os (High Current)=114, Manufacturer=STMicroelectronics, Operating Frequency(F) (Processor speed) (MHz)=180, Supplier Part Number 1=497-14053-ND, Supply Voltage(Vcc) max (V)=3.6, Supply Voltage(Vcc) min (V)=1.8, ComponentLink1Description="Manufacturer URL", ComponentLink1URL=http://www.st.com/web/en/home.html, ComponentLink2Description=Datasheet, ComponentLink2URL=http://www.st.com/st-web-ui/static/active/en/resource/technical/document/data_brief/DM00053488.pdf, ComponentLink3Description="Package Specification", ComponentLink3URL=http://www.st.com/st-web-ui/static/active/en/resource/technical/document/datasheet/DM00037051.pdf, Core="ARM Cortex-M4", D/A Converter=2x12-bit, DatasheetVersion="Rev. 2", FLASH Size (Prog) (kB)=2048, Internal RAM Size (kB)=256, Mounting Technology="Surface Mount", PackageDescription="144-Pin Low Profile Quad Flat Package, 20 x 20 mm Body, 0.5 mm Pitch", PackageReference=LQFP144, PackageVersion="Rev. 4, 06/2013", Packing=Tray, PartNumber=STM32F429ZIT6, Supplier 1=Digi-Key, Supplier 2=Newark, Supplier 3=Mouser, Supplier Part Number 2=06X3676, Supplier Part Number 3=511-STM32F429ZIT6
U2: "DRAM 64M (4Mx16) 166MHz SDR SDRAM, 3.3V", Case/Package=TSOP, Frequency=166MHz, Manufacturer=ISSI, Manufacturer Part Number=IS42S16400J-6TLI, Max Operating Temperature=85°C, Max Supply Voltage=3.6V, Min Operating Temperature=-40°C, Min Supply Voltage=3V, Nominal Supply Current=100mA, Operating Supply Voltage=3.3V, Package Quantity=108, Access Time=5.4ns, Address Bus Width=14b, ComponentLink1Description=https://www.verical.com/server-webapp/html/getDatasheet?partID=783875&src-supplier=Verical, ComponentLink1URL=https://www.verical.com/server-webapp/html/getDatasheet?partID=783875&src-supplier=Verical, Data Bus Width=16b, Density=64Mb, Interface=Parallel, Lead Free="Lead Free", Max Frequency=166MHz, Memory Size=64Mb, Memory Type=RAM,SDRAM, Mount="Surface Mount", Number of Pins=54, Packaging=Tray, Pricing 1="1=1.29, 10=1.29, 25=1.29, 50=1.19, 100=1.19 (USD)", Radiation Hardening=No, Stock 1=1136, Supplier 1=Avnet
U3: "CMOS 8-Stage Static Shift Register, PW0016A, TUBE", F @ Nom Voltage(Max)(Mhz)=8, Generic Part Number=CD4021B, ICC @ Nom Voltage(Max)(mA)=0.3, Manufacturer="Texas Instruments", Operating Temperature Range(C)="-55 to 125", Rating=Military, tpd @ Nom Voltage(Max)(ns)=160, Voltage(Nom)(V)=10, 3-State Output=No, Bits=4, Code_JEDEC=MO-153, ComponentLink1Description="Manufacturer URL", ComponentLink1URL=http://www.ti.com/, ComponentLink2Description=Datasheet, ComponentLink2URL=http://www.ti.com/lit/ds/symlink/cd4021b.pdf, ComponentLink3Description="Package Specification", ComponentLink3URL=http://www.ti.com/lit/ml/mpds361/mpds361.pdf, DatasheetVersion=SCHS024C, Input Type=CMOS, Output Drive (IOL/IOH)(Max)(mA)=1.5/-1.5, Output Type=CMOS, PackageReference=PW0016A, PartNumber=CD4021BPW, Technology Family=CD4000, VCC(Max)(V)=18, VCC(Min)(V)=3

## Free pads (board coordinates)
  round 3.5 hole 3: 0(4,6) 0(4,98) 0(72,98) 0(72,6)

## Via types
v1: diameter 0.4, hole 0.3, Top Layer to Bottom Layer, 225 vias
v2: diameter 0.65, hole 0.5, Top Layer to Bottom Layer, 2 vias
v3: diameter 0.6, hole 0.4, Top Layer to Bottom Layer, 2 vias
v4: diameter 0.45, hole 0.3, Top Layer to Bottom Layer, 1 vias

## Nets (pads, with @x,y where several pads share a name; then routed paths per layer and width w, separated by ;. In a path a pad name is that pad's centre, name@x,y a point inside that pad or via, vN(x,y) a via of type N, cw(c..) or ccw(c..) an arc to the next point about the centre after c; other vN are vias at no path point)
3V3: C2.2 C3.2 C4.2 C5.2 C6.2 C7.2 C8.1 C9.1 C15.1 C16.1 C17.1 C18.1 C19.1 C20.1 C21.1 C22.1 C23.1 C24.1 C25.1 C26.1 C27.1 C28.1 C41.2 C42.2 C101.2 M1.5 M41.40 M41.41 M41.42 M101.1 M102.1 P2.1 P3.4 P4.1 P5.1 R2.2 R5.1 R6.1 R7.1 R8.1 R9.1 R10.1 R11.1 R22.1 R23.1 R24.1 R25.1 R42.1 R43.1 R44.1 R45.2 R46.2 R47.2 R48.2 R53.1 R54.1 R55.1 R56.1 SW2.3 SW2.4 U1.17 U1.30 U1.33 U1.39 U1.52 U1.62 U1.72 U1.84 U1.95 U1.108 U1.121 U1.131 U1.143 U1.144 U2.1 U2.3 U2.9 U2.14 U2.27 U2.43 U2.49 U3.16 | length 596
  Top Layer w0.254: 11.303,54.096 11.309,54.102 v1(12.319,54.102) ; v1(16.74,43.942) C101.2@16.74,45.297 16.782,45.339 U3.16@19.026,45.339 ; R11.1@17.409,87.13 R10.1@18.806,87.13 R9.1@21.092,87.13 ; v1(21.082,85.852) 21.082,87.12 R9.1@21.092,87.13 ; v1(21.717,56.769) R45.2@23.479,56.769 R46.2@23.479,57.912 R47.2@23.479,59.055 R48.2@23.479,60.198 R44.1@23.479,61.924 23.479,64.335 R42.1@23.471,64.343 ; P3.4@22.151,90.31 22.151,89.027 22.362,88.816 C28.1@22.362,88.065 ; 22.198,73.972 21.312,73.086 21.312,70.239 21.797,69.754 21.826,69.754 22.074,69.506 C42.2@22.074,69.481 22.074,68.776 22.223,68.627 R53.1@23.476,68.627 23.476,69.974 R54.1@23.479,69.977 ; 22.201,73.975 22.201,74.295 ; C41.2@22.201,75.142 22.201,74.295 ; R55.1@23.476,73.707 23.476,74.334 ; R56.1@23.476,74.977 23.476,74.334 ; R6.1@26.426,87.13 R7.1@25.029,87.13 R8.1@23.716,87.13 23.297,87.13 C28.1@22.362,88.065 ; v1(30.615,57.158) 31.244,57.158 31.367,57.281 31.417,57.281 31.576,57.44 U1.131@34.41,57.44 ; v1(32.701,48.369) 31.244,49.826 31.244,50.969 31.273,50.94 U1.144@34.41,50.94 U1.143@34.41,51.44 ; v1(33.944,79.594) U2.1@34.941,79.594 34.941,78.726 35.604,78.063 C22.1@35.604,77.343 C23.1@36.917,77.343 36.541,77.719 U2.3@36.541,79.594 ; U1.121@34.41,62.44 33.063,62.44 32.98,62.523 C16.1@31.367,62.523 29.386,62.523 27.796,64.114 27.796,72.253 25.233,74.816 25.233,76.732 24.741,77.224 21.598,77.224 21.336,76.962 21.336,74.756 v1(21.717,74.375) 22.121,74.375 22.201,74.295 ; v1(35.028,45.085) R2.2@35.71,45.085 ; C15.1@35.028,70.617 C15.1@35.144,70.617 36.188,70.617 36.21,70.596 U1.108@36.21,70.24 36.21,69.603 36.188,69.582 36.167,69.603 v1(35.814,69.603) ; v1(38.906,92.4) C21.1@38.906,92.964 ; U2.49@38.941,91.094 v1@38.941,92.4 ; v1(40.707,78.205) 41.362,78.205 ; U2.9@41.341,79.594 41.362,79.573 41.362,78.205 ; C25.1@41.362,77.343 41.362,78.205 ; v1(42.479,72.517) 42.479,72.016 42.71,71.785 U1.95@42.71,70.24 ; U2.43@43.741,91.094 v1(43.741,92.329) 43.893,92.482 43.893,92.956 C24.1@43.902,92.964 ; U1.17@44.21,49.14 44.21,45.496 44.321,45.385 44.321,45.335 44.444,45.212 C2.2@44.494,45.212 45.16,45.212 v1(45.452,45.504) ; v1(44.624,78.279) 45.341,78.279 ; C26.1@45.256,77.343 45.341,77.428 45.341,78.279 ; U2.14@45.341,79.594 45.341,78.279 ; v1(47.922,73.66) C6.2@47.966,73.66 48.016,73.66 48.139,73.537 48.139,73.459 48.21,73.388 U1.84@48.21,70.24 ; v1(49.683,45.491) 49.7,45.508 C19.1@50.583,45.508 50.583,45.558 50.71,45.685 U1.30@50.71,49.14 ; U1.33@52.21,49.14 52.21,46.058 52.587,45.681 52.587,45.631 52.71,45.508 52.71,45.204 53.46,44.454 C9.1@53.46,43.942 54.357,43.942 55.373,44.958 R5.1@58.083,44.958 58.083,44.188 58.583,43.688 60.527,43.688 61.669,44.83 61.669,50.683 60.198,52.154 ; C8.1@52.76,45.504 v1(54.089,45.504) ; U1.39@55.51,51.94 58.927,51.94 C3.2@59.057,52.07 ; U1.72@55.51,68.44 55.516,68.434 v1(56.709,68.434) ; v1(55.713,76.403) C27.1@55.713,76.962 55.741,76.99 U2.27@55.741,79.594 ; C3.2@59.184,52.154 60.198,52.154 ; C4.2@59.184,58.716 59.184,58.666 59.061,58.543 59.011,58.543 58.908,58.44 U1.52@55.51,58.44 55.501,58.449 54.576,58.449 54.283,58.742 54.283,59.256 v1(52.832,60.707) 52.832,61.646 52.869,61.682 v1(52.869,61.722) 52.398,62.193 52.398,63.852 52.66,64.114 53.337,64.114 54.011,63.44 U1.62@55.51,63.44 58.828,63.44 59.011,63.623 59.061,63.623 59.184,63.746 C5.2@59.184,63.796 ; R25.1@63.156,97.671 63.156,97.133 64.277,96.012 65.471,96.012 65.725,95.758 v1(67.183,95.758) 67.564,95.758 67.887,96.081 R24.1@67.887,97.671 ; R23.1@66.548,55.245 66.548,52.832 65.87,52.154 60.198,52.154 ; R9.1@21.092,87.13 21.427,87.13 C28.1@22.362,88.065 ; 22.201,74.295 22.24,74.334 23.476,74.334
  Top Layer w0.508: v2(11.303,51.121) 11.303,54.096 11.303,57.071 M1.5@11.382,57.15 ; v1(26.924,33.782) M102.1@29.567,33.782 ; v1(34.417,33.902) 34.773,33.546 SW2.3@36.679,33.546 SW2.4@39.219,33.546 43.198,33.546 43.434,33.782 M101.1@46.331,33.782 ; R2.2@35.639,45.014 35.664,45.014 35.71,45.06 R2.2@35.71,45.085
  Power Layer w0.254: v1(12.319,54.102) 12.954,53.467 21.717,53.467 ; v1(21.082,85.852) 21.082,85.471 21.717,84.836 v1(21.717,74.375) 21.717,66.802 ; 26.924,42.592 27.131,42.799 28.44,42.799 29.305,43.664 29.305,44.973 30.099,45.767 ; v1(30.615,57.158) 26.924,53.467 21.717,53.467 ; v1(32.701,48.369) 30.099,45.767 ; v1(33.944,79.594) 33.944,69.596 ; v1(35.028,45.085) 34.346,45.767 ; v1(35.814,69.603) 35.802,69.615 34.834,69.615 34.815,69.596 33.944,69.596 ; v1(42.479,72.517) 42.479,66.562 38.1,62.183 38.1,58.801 37.153,57.854 35.179,57.854 32.974,60.059 32.974,66.83 ; v1(52.869,61.722) 54.102,61.722 54.864,62.484 ; v1(55.713,76.403) 56.709,75.406 ; v1(67.183,95.758) 67.183,85.88 56.709,75.406 ; 21.717,53.467 v1(21.717,56.769) 21.717,66.802 ; 21.717,66.802 21.753,66.838 22.371,66.838 22.379,66.83 22.815,66.83 22.823,66.838 32.19,66.838 32.198,66.83 32.974,66.83 ; 30.099,45.767 34.346,45.767 ; 32.974,66.83 33.944,67.8 33.944,69.596 ; 34.346,45.767 45.172,45.767 45.448,45.491 v1(49.683,45.491) 49.696,45.504 v1(54.089,45.504) 55.713,47.128 55.713,50.435 53.297,52.851 48.284,52.851 47.371,53.764 47.371,55.245 47.693,55.567 51.911,55.567 54.864,58.52 54.864,62.484 ; 54.864,62.484 54.864,66.589 v1(56.709,68.434) 56.709,75.406
  Power Layer w0.508: v2(11.303,51.121) 11.303,46.736 14.097,43.942 v1(16.74,43.942) 26.289,43.942 26.924,43.307 26.924,42.592 v1(26.924,33.782) ; P4.1@11.914,12 12.002,11.912 12.002,10.786 13.009,9.779 24.638,9.779 29.21,14.351 40.362,14.351 ; v1(34.417,33.902) 27.044,33.902 v1(26.924,33.782) ; P5.1@54.332,12 49.595,12 47.244,14.351 40.362,14.351 ; v1(26.924,33.782) 26.924,31.75 28.448,30.226 38.408,30.226 40.362,28.272 P2.1@40.362,16.256 40.362,14.351
  Bottom Layer w0.254: v1(21.082,85.852) 22.987,87.757 34.263,87.757 37.565,91.059 ; v1(21.717,74.375) 21.336,74.756 21.336,76.962 21.728,77.354 M41.40@27.818,77.354 M41.41@27.818,77.854 M41.42@27.818,78.354 ; v1(33.944,79.594) v1(33.944,79.594) 35.331,78.205 38.1,78.205 38.608,78.713 39.728,78.713 40.236,78.205 v1(40.707,78.205) 41.569,78.205 41.983,78.619 43.301,78.619 43.641,78.279 v1(44.624,78.279) 44.624,76.958 v1(47.922,73.66) ; v1(38.906,92.4) 37.565,91.059 ; v1(43.741,92.329) 42.471,91.059 37.565,91.059 ; C20.1@52.241,66.548 55.245,66.548 56.709,68.012 v1(56.709,68.434)
5V: M1.7 P2.3 | length 55.8
  Top Layer w0.254: M1.7@6.882,83.15 M1.7@6.985,83.047
  Top Layer w0.508: v2(14.327,54.229) 14.327,57.095 M1.7@14.382,57.15
  Bottom Layer w0.508: v2(14.327,54.229) 15.562,52.994 24.603,52.994 32.977,44.62 32.977,43.967 33.36,43.584 34.013,43.584 35.013,42.584 35.013,38.115 35.79,37.338 35.79,17.026 35.282,16.518 P2.3@35.282,16.256
ADC123_IN1: M1.4 U1.35 | length 52
  Top Layer w0.254: v1(9.882,53.594) M1.4@9.882,57.15 9.882,57.718 10.227,58.063 M1.4@10.355,58.063 ; v1(53.187,47.623) 53.187,49.117 U1.35@53.21,49.14
  Power Layer w0.254: v1(9.882,53.594) 10.644,52.832 21.463,52.832 24.765,49.53 51.279,49.53 v1(53.187,47.623)
BOOT0: R3.2 SW2.2 U1.138 | length 17.2
  Top Layer w0.254: R3.2@33.631,42.348 36.477,42.348 SW2.2@36.679,42.146 ; U1.138@34.41,53.94 36.29,53.94 v1(36.706,54.356) ; SW2.2@36.706,43.023 v1(36.706,43.942)
  Bottom Layer w0.254: v1(36.706,43.942) 37.027,44.263 37.027,54.035 v1(36.706,54.356)
BOOT1: R4.2 SW2.1 U1.48 | length 43
  Top Layer w0.254: v1(41.759,47.318) 41.759,44.686 SW2.1@39.219,42.146 42.495,42.146 R4.2@42.521,42.172 ; U1.48@55.51,56.44 58.323,56.44 60.915,53.848 v1(62.956,53.848)
  Bottom Layer w0.254: v1(41.759,47.318) 41.759,48.931 42.423,49.596 58.843,49.596 62.956,53.709 v1(62.956,53.848)
CLK: R104.2 U3.10 | length 5.5
  Top Layer w0.254: U3.10@19.026,49.239 18.047,49.239 17.629,49.657 17.629,50.492 18.077,50.94 19.166,50.94 19.669,51.443 R104.2@20.364,51.443
DATA: R106.2 U3.3 | length 6.4
  Top Layer w0.254: R106.2@23.725,51.443 23.725,50.589 23.441,50.305 23.441,46.639 U3.3@24.926,46.639
DOTCLK: M41.13 R42.2 U1.92 | length 27.7
  Top Layer w0.254: R42.2@24.471,64.343 24.514,64.3 v1(25.36,64.3) ; v1(36.933,62.354) 41.054,62.354 41.692,62.992 42.775,62.992 44.831,65.048 44.831,66.553 44.252,67.133 44.252,69.273 44.233,69.292 44.233,70.217 U1.92@44.21,70.24
  Bottom Layer w0.254: v1(25.36,64.3) 25.806,63.854 M41.13@27.818,63.854 33.029,63.854 33.153,63.73 34.357,63.73 35.131,62.955 36.332,62.955 v1(36.933,62.354)
GND: C1.1 C2.1 C3.1 C4.1 C5.1 C6.1 C7.1 C8.2 C9.2 C10.1 C11.1 C12.2 C13.2 C14.2 C15.2 C16.2 C17.2 C18.2 C19.2 C20.2 C21.2 C22.2 C23.2 C24.2 C25.2 C26.2 C27.2 C28.2 C41.1 C42.1 C101.1 D1.2 M1.6 M1.8 M41.1 M41.43 M41.48 M41.49 M41.50 M101.6 M102.6 P1.3 P3.6 P3.9 P4.5 P5.5 P6.5 P7.2 P8.3 P8.6 R3.1 R4.1 R41.1 R49.2 R50.2 R51.2 R52.2 R57.2 R58.2 R59.2 R60.2 R101.2 R102.1 R103.1 SW1.3 SW1.4 U1.16 U1.31 U1.38 U1.51 U1.61 U1.83 U1.94 U1.107 U1.120 U1.130 U2.6 U2.12 U2.28 U2.41 U2.46 U2.52 U2.54 U3.8 | length 186.6
  Top Layer w0.254: v1(15.859,49.634) R101.2@15.859,48.895 15.859,46.609 16.071,46.397 C101.1@16.74,46.397 ; P3.9@16.403,90.435 16.403,93.437 17.581,94.615 19.433,94.615 19.951,94.097 P3.6@19.951,90.31 v1(19.951,88.632) ; C42.1@22.074,70.981 22.084,70.991 22.681,70.991 22.857,71.167 R58.2@23.479,71.167 23.476,71.17 R59.2@23.476,72.437 v1(22.576,72.437) ; C41.1@22.201,76.242 23.471,76.242 R60.2@23.476,76.247 ; v1(22.362,85.833) C28.2@22.362,86.965 ; v1(22.479,65.532) 22.484,65.537 R41.1@23.479,65.537 ; v1(22.576,81.921) R49.2@23.606,81.921 23.606,81.78 24.606,80.78 R51.2@24.606,80.66 24.606,80.478 23.606,79.478 R50.2@23.606,79.39 R52.2@23.606,78.15 v1(22.709,78.15) ; v1(22.597,67.357) R57.2@23.476,67.357 ; v1(24.892,51.105) 24.892,49.923 U3.8@24.926,49.889 ; v1(25.781,75.692) 25.781,74.993 28.25,72.524 28.25,64.757 29.384,63.623 C16.2@31.367,63.623 32.619,63.623 33.302,62.94 U1.120@34.41,62.94 ; v1(27.916,45.16) R102.1@27.916,46.058 ; v1(30.099,52.086) 30.125,52.112 C18.2@31.218,52.112 ; v1(30.111,58.866) 30.125,58.866 30.761,58.23 31.222,58.23 C17.2@31.244,58.208 31.244,58.158 31.367,58.035 31.42,58.035 31.515,57.94 U1.130@34.41,57.94 ; R3.1@33.631,43.348 v1(33.631,44.238) ; C15.2@34.044,70.617 34.044,69.336 34.292,69.088 v1(35.052,69.088) 35.173,68.967 36.466,68.967 36.71,69.21 U1.107@36.71,70.24 36.71,72.079 37.121,72.49 C13.2@37.171,72.49 C13.2@37.128,72.533 ; C22.2@34.504,77.343 v1(34.504,78.1) ; U2.54@34.941,91.094 34.941,91.961 v1(35.462,92.482) 35.487,92.456 36.541,92.456 ; U2.52@36.541,91.094 36.541,92.456 ; C21.2@37.806,92.964 36.832,92.964 36.541,92.673 36.541,92.456 ; U2.6@38.941,79.594 38.941,78.69 38.61,78.359 38.271,78.359 38.017,78.105 C23.2@38.017,77.343 38.483,77.343 v1(39.148,78.008) ; v1(40.023,44.238) C12.2@40.023,45.204 ; U2.46@41.341,91.094 v1(41.341,92.181) ; v1(42.462,78.063) C25.2@42.462,77.343 43.817,77.343 43.741,77.419 U2.12@43.741,79.594 ; R4.1@42.521,43.172 v1(43.529,43.172) ; C1.1@42.837,22.775 42.837,24.061 v1(42.84,24.065) ; U1.94@43.21,70.24 43.21,71.753 43.491,72.035 43.491,72.429 C7.1@43.579,72.517 43.629,72.517 43.752,72.394 43.752,72.344 v1(44.068,72.028) ; C2.1@43.394,45.212 C2.1@43.444,45.212 ; U1.16@43.71,49.14 43.71,45.528 43.567,45.385 43.567,45.335 C2.1@43.444,45.212 ; v1(44.567,43.942) 43.567,44.942 43.567,45.089 C2.1@43.444,45.212 ; C24.2@45.002,92.964 45.002,92.323 45.341,91.984 ; U2.41@45.341,91.094 45.341,91.984 ; v1(45.696,19.304) 46.331,19.939 M101.6@46.331,21.082 ; v1(45.749,92.392) 45.341,91.984 ; U1.83@48.71,70.24 48.71,73.304 48.893,73.487 48.893,73.537 49.016,73.66 C6.1@49.066,73.66 49.116,73.66 49.239,73.537 49.239,73.494 49.453,73.279 v1(49.453,73.272) ; C19.2@50.583,44.408 50.583,44.358 50.706,44.235 50.756,44.235 51.049,43.942 ; v1(50.776,60.866) 51.53,60.866 53.829,58.568 53.829,58.554 54.443,57.94 U1.51@55.51,57.94 58.912,57.94 59.061,57.791 59.061,57.789 59.065,57.785 C4.1@59.184,57.785 ; v1(51.049,43.185) 51.049,43.942 ; U1.31@51.21,49.14 51.21,45.958 51.487,45.681 51.487,45.631 51.627,45.491 51.627,45.022 51.96,44.689 C9.2@51.96,43.942 51.049,43.942 ; v1(52.935,63.137) 53.653,63.137 53.85,62.94 U1.61@55.51,62.94 58.912,62.94 58.983,62.869 59.061,62.869 59.184,62.746 C5.1@59.184,62.696 ; U1.38@55.51,51.44 58.798,51.44 59.011,51.227 59.061,51.227 59.184,51.104 C3.1@59.184,51.054 59.769,51.054 v1(60.75,50.073) ; U2.28@55.741,91.094 v1(55.741,91.911) ; v1(56.801,76.454) 56.801,76.951 C27.2@56.813,76.962 ; C11.1@59.133,48.26 59.133,47.295 59.508,46.92 59.508,46.857 59.756,46.609 C10.1@59.781,46.609 v1(60.834,46.609) ; v1(64.643,97.536) 65.672,97.536 D1.2@65.786,97.65
  Top Layer w0.381: v1(9.638,93.726) v1(9.638,95.137) P6.5@9.638,97.249 ; v1(27.051,21.082) M102.6@29.567,21.082 ; v1(34.036,20.282) SW1.4@35.699,20.282 SW1.3@35.699,28.232
  Top Layer w0.508: M1.8@5.382,83.15 5.382,84.864 5.68,85.162 6.072,85.162 ; P7.2@6.072,87.376 6.072,85.162 ; M1.6@8.382,83.15 8.38,83.152 8.38,84.687 7.905,85.162 6.072,85.162 ; M1.6@12.882,57.15 v3(12.882,59.309) ; M1.8@15.882,57.15 v3(15.882,59.295)
  Bottom Layer w0.254: v1(22.576,81.921) 24.951,81.921 25.412,82.381 27.791,82.381 M41.50@27.818,82.354 M41.49@27.818,81.854 M41.48@27.818,81.354 ; v1(22.709,78.15) 25.522,78.15 25.991,78.619 25.991,78.639 26.182,78.831 26.2,78.831 26.223,78.854 M41.43@27.818,78.854 ; M41.1@27.818,57.854 27.841,57.877 29.453,57.877 29.645,58.069 29.645,58.08 30.111,58.547 v1(30.111,58.866) ; v1@45.722,92.365 v1(45.749,92.392) ; v1(49.784,63.736) 51.141,65.093 C20.2@51.141,66.548 ; C14.2@52.435,63.119 52.452,63.137 v1(52.935,63.137)
  other v4: 22.836,76.242
LCD_B2: M41.32 U1.122 | length 36.1
  Top Layer w0.254: U1.122@34.41,61.94 35.716,61.94 35.826,61.83 36.316,61.83 36.426,61.94 36.602,61.94 36.715,61.827 41.483,61.827 42.096,62.44 42.982,62.44 v1(44.068,63.526)
  Bottom Layer w0.254: M41.32@27.818,73.354 29.844,73.354 29.933,73.443 32.706,73.443 33.015,73.751 33.015,74.025 33.43,74.44 38.911,74.44 40.105,73.246 40.647,73.246 43.35,70.544 43.35,66.695 42.685,66.03 42.685,65.052 44.068,63.669 v1(44.068,63.526)
LCD_B3: M41.31 U1.126 | length 36.7
  Top Layer w0.254: U1.126@34.41,59.94 39.643,59.94 39.689,59.986 40.146,59.986 40.596,60.436 40.784,60.436 40.9,60.552 41.183,60.552 42.607,61.976 43.288,61.976 v1(44.05,62.738)
  Bottom Layer w0.254: M41.31@27.818,72.854 29.986,72.854 30.121,72.989 32.894,72.989 33.469,73.563 33.469,73.837 33.618,73.986 38.723,73.986 39.917,72.792 40.459,72.792 42.896,70.356 42.896,66.883 42.231,66.218 42.231,64.864 42.896,64.199 42.896,63.892 v1(44.05,62.738)
LCD_B4: M41.30 U1.127 | length 36.7
  Top Layer w0.254: U1.127@34.41,59.44 34.433,59.417 39.975,59.417 40.09,59.532 40.334,59.532 40.784,59.982 40.972,59.982 41.061,60.071 41.344,60.071 42.713,61.44 43.568,61.44 v1(44.068,61.94)
  Bottom Layer w0.254: M41.30@27.818,72.354 30.128,72.354 30.309,72.535 33.082,72.535 34.08,73.532 38.535,73.532 39.729,72.338 40.271,72.338 42.442,70.168 42.442,67.071 41.777,66.406 41.777,64.676 42.442,64.011 42.442,63.566 v1(44.068,61.94)
LCD_B5: M41.29 U1.37 | length 45.4
  Top Layer w0.254: v1(50.776,58.166) 50.776,53.667 52.627,51.816 53.561,51.816 54.437,50.94 U1.37@55.51,50.94
  Bottom Layer w0.254: M41.29@27.818,71.854 30.27,71.854 30.497,72.081 33.27,72.081 34.268,73.078 38.347,73.078 39.541,71.884 40.083,71.884 41.988,69.98 41.988,67.259 41.323,66.594 41.323,64.488 41.988,63.823 41.988,63.275 43.85,61.413 43.902,61.413 44.153,61.162 44.153,59.556 45.543,58.166 v1(50.776,58.166)
LCD_B6: M41.28 U1.139 | length 40.7
  Top Layer w0.254: U1.139@34.41,53.44 39.346,53.44 40.235,54.329 40.235,58.929 40.384,59.078 40.522,59.078 40.972,59.528 41.16,59.528 41.249,59.617 41.61,59.617 42.896,60.903 v1(43.594,60.903)
  Bottom Layer w0.254: M41.28@27.818,71.354 27.821,71.357 30.415,71.357 30.685,71.627 33.458,71.627 34.456,72.624 38.159,72.624 39.353,71.43 39.895,71.43 41.534,69.792 41.534,67.447 40.869,66.782 40.869,64.3 41.534,63.635 41.534,62.963 v1(43.594,60.903)
LCD_B7: M41.27 U1.140 | length 40.1
  Top Layer w0.254: U1.140@34.41,52.94 34.433,52.917 39.603,52.917 40.769,54.083 40.769,58.624 40.851,58.624 40.851,58.765 41.16,59.074 41.882,59.074 v1(43.156,60.348)
  Bottom Layer w0.254: M41.27@27.818,70.854 30.554,70.854 30.873,71.173 33.647,71.173 34.644,72.17 37.971,72.17 39.165,70.976 39.707,70.976 41.08,69.603 41.08,67.635 40.415,66.97 40.415,64.112 41.08,63.447 41.08,62.564 43.156,60.487 v1(43.156,60.348)
LCD_CSX: M41.38 U1.88 | length 23.2
  Top Layer w0.254: U1.88@46.21,70.24 v1(46.21,71.619)
  Bottom Layer w0.254: M41.38@27.818,76.354 43.918,76.354 46.21,74.063 v1(46.21,71.619)
LCD_DCX: M41.37 U1.41 | length 47.1
  Top Layer w0.254: v1(51.284,59.53) 51.387,59.427 51.387,57.527 51.399,57.515 51.399,55.736 51.926,55.209 51.926,54.539 53.524,52.94 U1.41@55.51,52.94
  Bottom Layer w0.254: M41.37@27.818,75.854 43.776,75.854 45.673,73.957 45.673,70.189 44.915,69.431 44.915,67.6 45.288,67.227 47.921,67.227 48.255,66.893 48.255,62.559 v1(51.284,59.53)
LCD_DE: M41.14 R41.2 U1.22 | length 34.1
  Top Layer w0.254: R41.2@24.479,65.537 24.51,65.568 v1(25.412,65.568) ; U1.22@46.71,49.14 v1(46.71,55.372)
  Bottom Layer w0.254: v1(25.412,65.568) 25.848,65.131 25.848,64.711 26.205,64.354 M41.14@27.818,64.354 30.237,64.354 30.283,64.308 33.217,64.308 33.342,64.184 34.545,64.184 35.32,63.409 37.088,63.409 37.237,63.26 37.237,62.796 37.46,62.572 37.46,62.429 37.714,62.175 37.714,60.871 40.565,58.02 41.596,58.02 41.615,58.039 41.969,58.039 44.636,55.372 v1(46.71,55.372)
LCD_G2: M41.26 U1.42 | length 41.8
  Top Layer w0.254: v1(51.914,57.745) 51.926,57.733 51.926,55.943 52.91,54.959 52.941,54.959 54.46,53.44 U1.42@55.51,53.44
  Bottom Layer w0.254: M41.26@27.818,70.354 30.697,70.354 31.061,70.719 33.835,70.719 34.832,71.716 37.783,71.716 38.977,70.522 39.519,70.522 40.626,69.415 40.626,67.823 39.961,67.158 39.961,63.924 40.626,63.259 40.626,62.376 42.629,60.372 42.629,60.129 42.938,59.821 42.985,59.821 45.167,57.639 51.807,57.639 v1(51.914,57.745)
LCD_G3: M41.25 U1.125 | length 29.7
  Top Layer w0.254: U1.125@34.41,60.44 39.958,60.44 40.408,60.89 40.596,60.89 v1(40.869,61.162)
  Bottom Layer w0.254: M41.25@27.818,69.854 30.839,69.854 31.249,70.265 34.023,70.265 35.02,71.262 37.595,71.262 38.789,70.068 39.331,70.068 40.172,69.227 40.172,68.011 39.507,67.346 39.507,64.913 39.216,64.623 39.216,64.598 39.507,64.307 39.507,63.736 40.172,63.071 40.172,62.188 40.869,61.491 v1(40.869,61.162)
LCD_G4: M41.24 U1.69 | length 48
  Top Layer w0.254: v1(53.596,65.278) 54.177,65.859 54.177,66.532 54.585,66.94 U1.69@55.51,66.94
  Bottom Layer w0.254: M41.24@27.818,69.354 30.981,69.354 31.437,69.811 34.211,69.811 35.208,70.808 37.407,70.808 38.601,69.614 39.143,69.614 39.718,69.039 39.718,68.199 39.053,67.534 39.053,65.101 38.762,64.811 38.762,64.41 39.053,64.119 39.053,63.548 39.331,63.27 39.331,63.126 39.53,62.927 39.53,61.623 40.955,60.198 41.966,60.198 42.175,59.989 42.175,59.941 42.75,59.367 42.797,59.367 44.607,57.557 44.607,57.47 44.892,57.185 52.869,57.185 53.596,57.912 v1(53.596,65.278)
LCD_G5: M41.23 U1.70 | length 50.5
  Top Layer w0.254: v1(53.208,65.805) 53.723,66.32 53.723,66.72 54.443,67.44 U1.70@55.51,67.44
  Bottom Layer w0.254: M41.23@27.818,68.854 30.251,68.854 30.297,68.9 31.169,68.9 31.611,69.342 34.384,69.342 35.396,70.354 37.219,70.354 38.413,69.16 38.955,69.16 39.264,68.851 39.264,68.387 38.599,67.722 38.599,65.289 38.308,64.999 38.308,64.222 38.599,63.931 38.599,63.36 38.822,63.137 38.822,62.993 39.076,62.739 39.076,61.435 40.882,59.629 41.845,59.629 42.562,58.913 42.609,58.913 44.153,57.369 44.153,57.282 44.704,56.731 53.151,56.731 54.141,57.721 54.141,65.809 54.137,65.805 v1(53.208,65.805)
LCD_G6: M41.22 U1.97 | length 16.5
  Top Layer w0.254: v1(37.027,67.437) 40.744,67.437 40.747,67.434 41.71,68.397 U1.97@41.71,70.24
  Bottom Layer w0.254: M41.22@27.818,68.354 33.699,68.354 34.608,67.446 37.019,67.446 v1(37.027,67.437)
LCD_G7: M41.21 U1.117 | length 14.7
  Top Layer w0.254: U1.117@34.41,64.44 36.804,64.44 37.06,64.696 v1(37.06,65.786)
  Bottom Layer w0.254: M41.21@27.818,67.854 32.168,67.854 32.198,67.884 33.493,67.884 34.47,66.907 35.988,66.907 36.072,66.992 36.508,66.992 36.592,66.907 37.027,66.907 37.06,66.875 v1(37.06,65.786)
LCD_HSYNC: M41.12 R43.2 U1.96 | length 26.9
  Top Layer w0.254: R43.2@24.471,63.124 24.519,63.172 v1(25.36,63.172) ; v1(36.044,62.357) 36.627,62.94 40.854,62.94 41.429,63.515 42.496,63.515 43.754,64.773 43.754,65.613 42.187,67.18 42.187,70.217 U1.96@42.21,70.24
  Bottom Layer w0.254: v1(25.36,63.172) 25.565,63.377 27.795,63.377 M41.12@27.818,63.354 32.887,63.354 32.965,63.276 34.169,63.276 35.087,62.357 v1(36.044,62.357)